# Allegro board proj1.brd
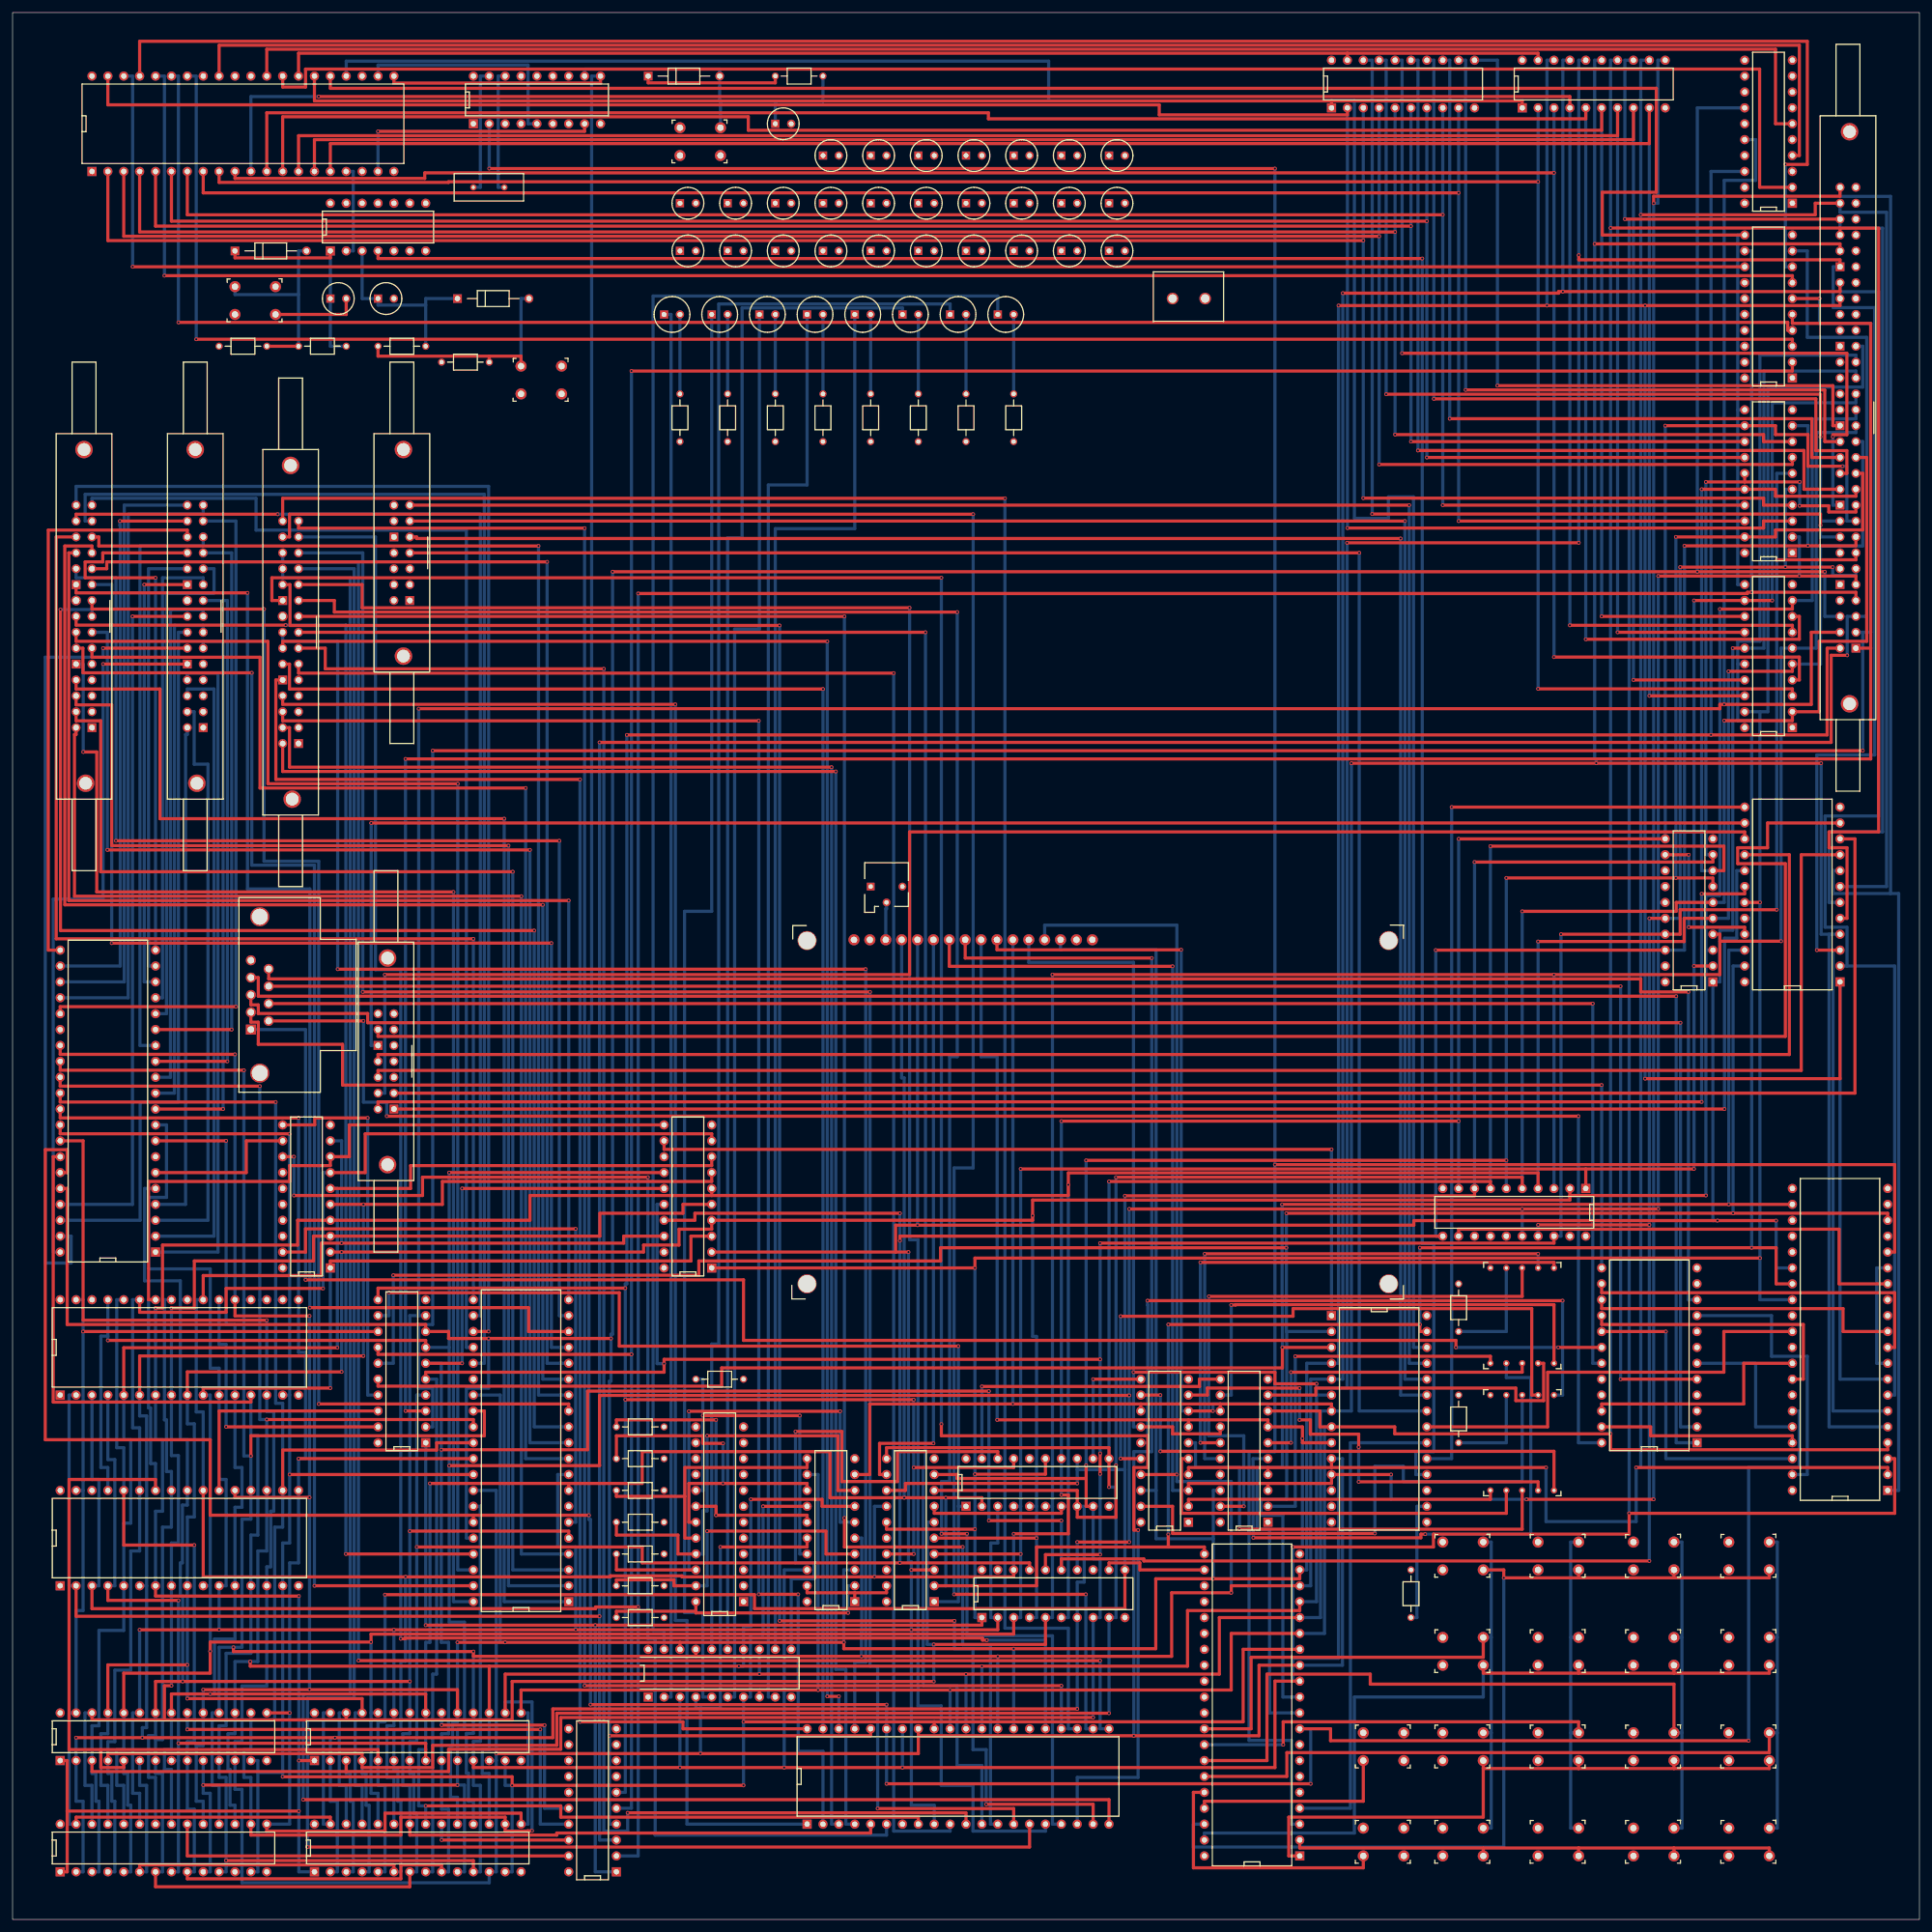
[diagram p0: board, top side]
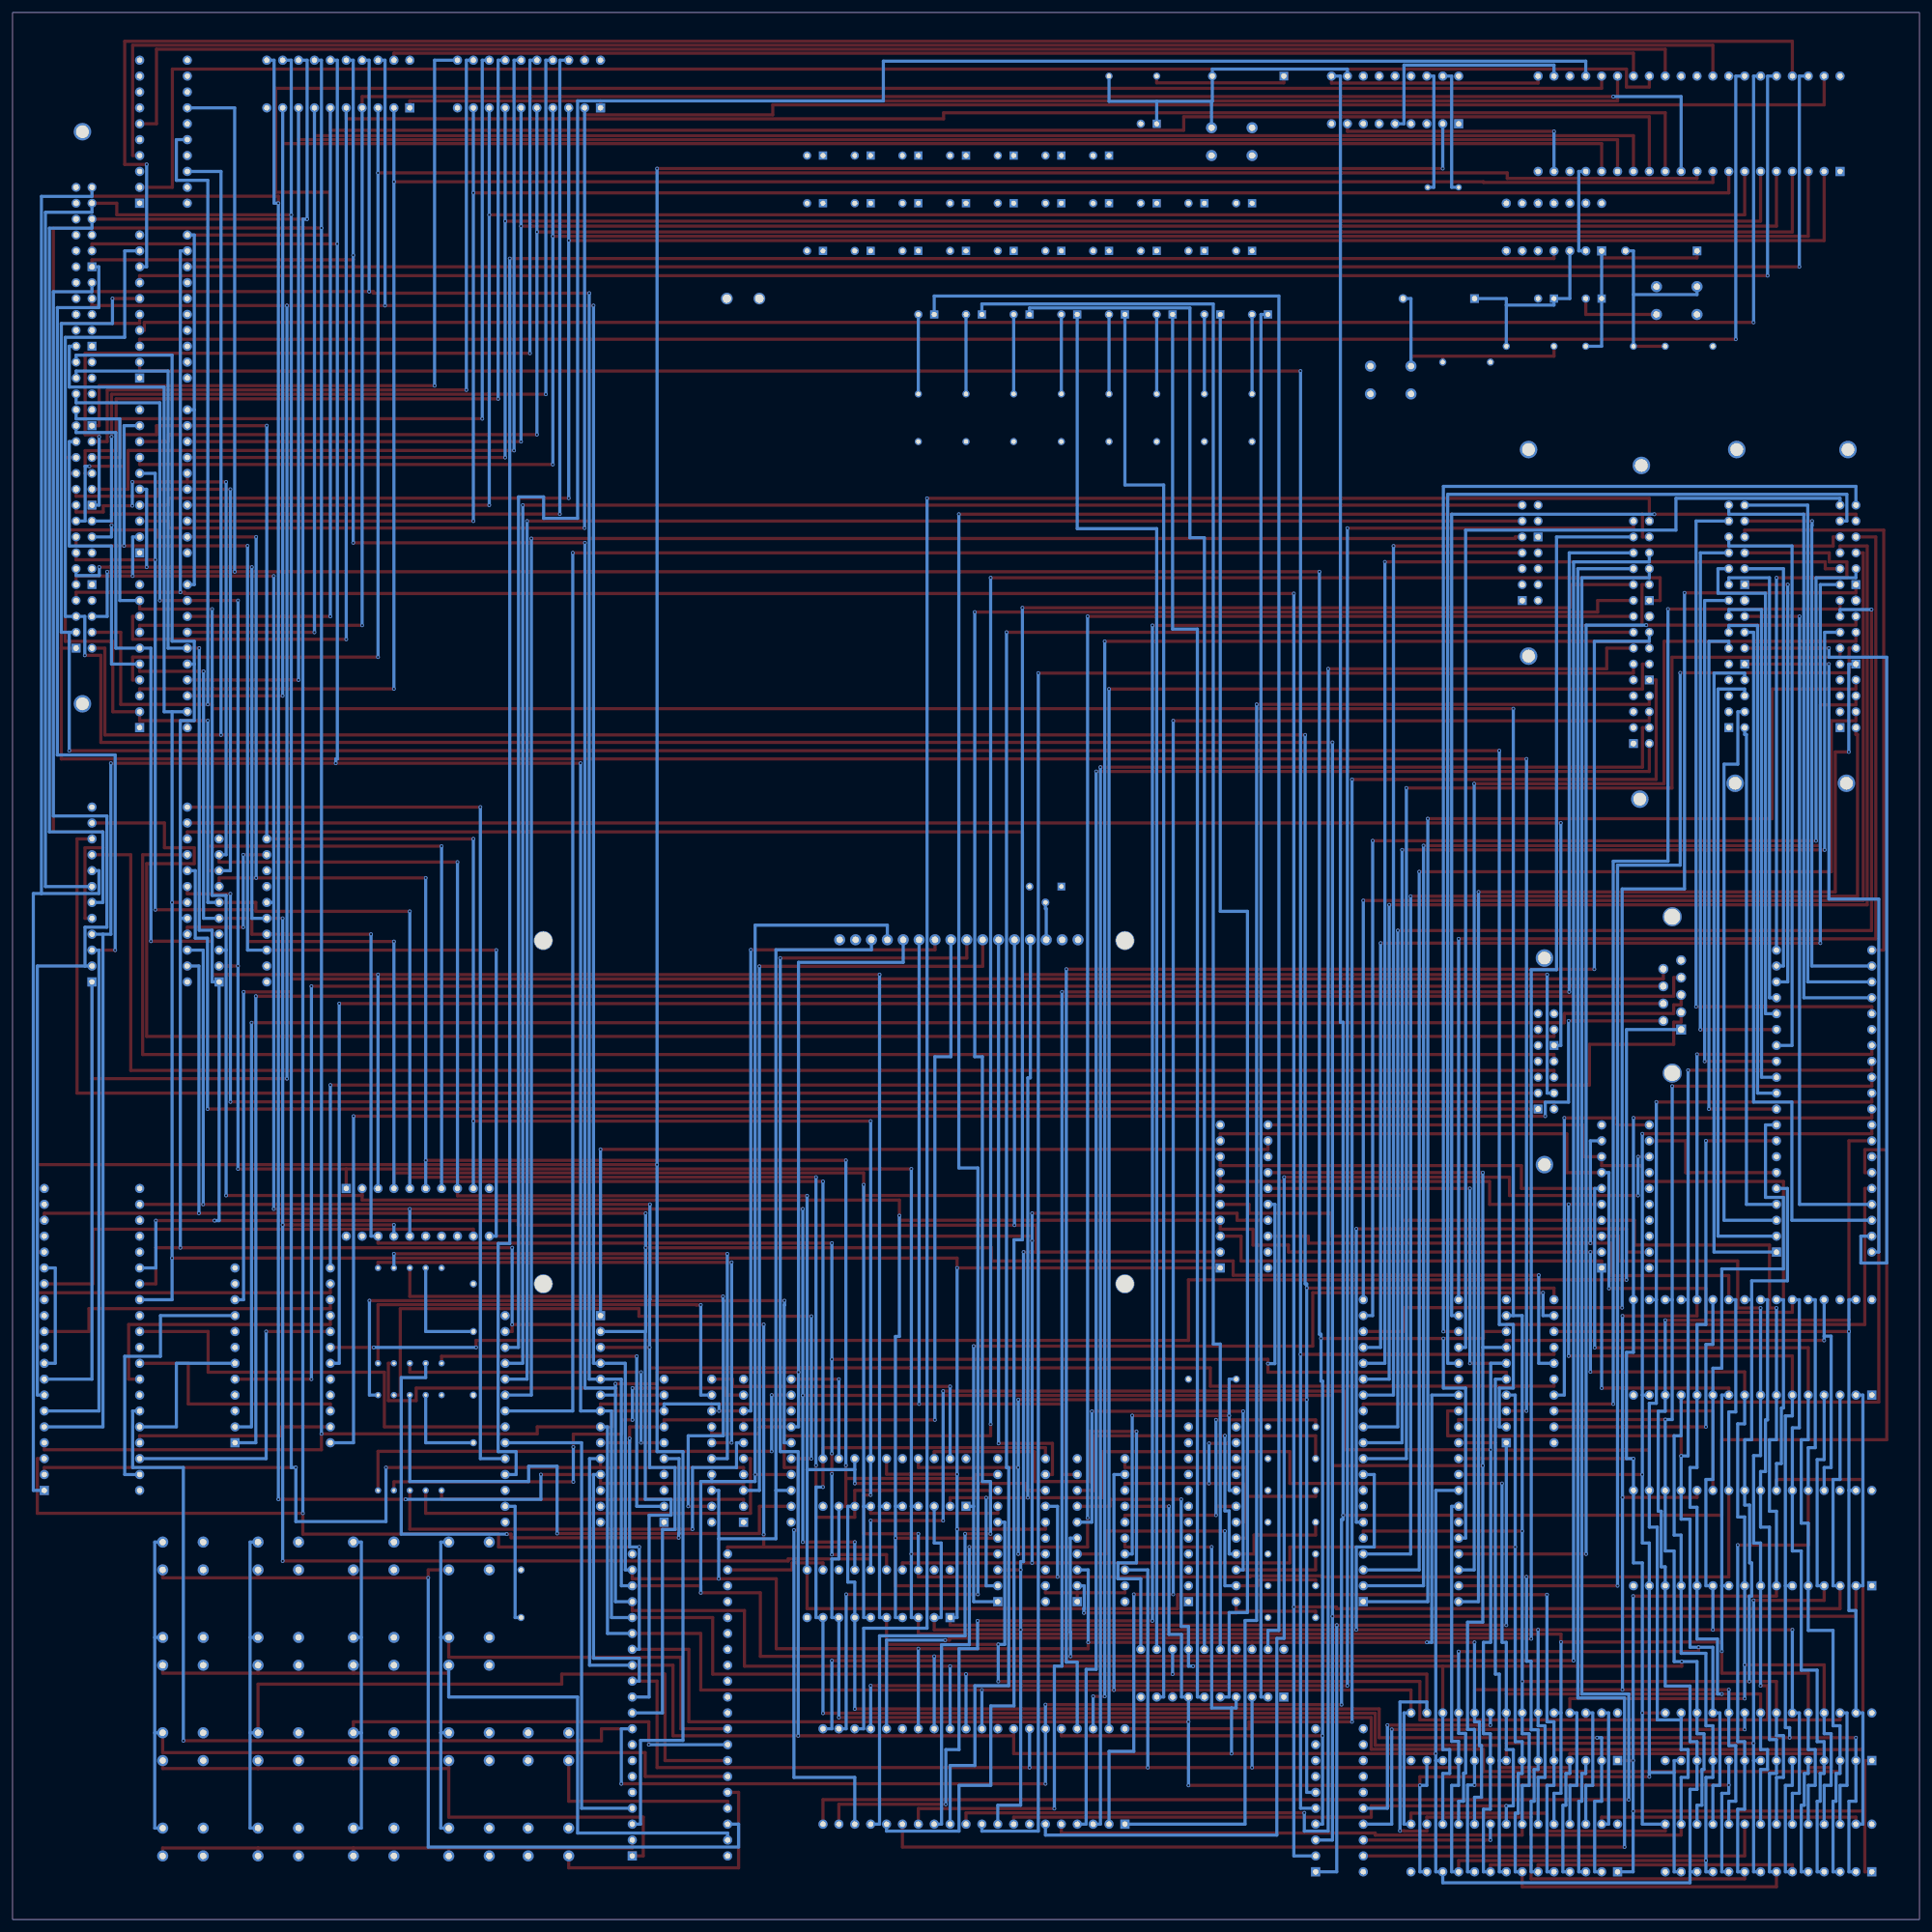
[diagram p1: board, bottom side, seen from below]

Outline 304.8 x 304.8 mm; copper layers: TOP, GND, POWER, BOTTOM. Coordinates in mm from the lower left corner of the outline.
Outline path: rectangle 0,0 304.8,304.8

## Placement (name value [footprint] x y rotation side)
C1  10u  [CPCYL1D200LS100031]  121.92 287.02 0 top
C8  0.1u  [CPCYL1D200LS100031]  175.26 266.7 0 top
C9  0.1u  [CPCYL1D200LS100031]  167.64 266.7 0 top
C10  0.1u  [CPCYL1D200LS100031]  160.02 266.7 0 top
C11  0.1u  [CPCYL1D200LS100031]  152.4 266.7 0 top
C12  0.1u  [CPCYL1D200LS100031]  144.78 266.7 0 top
C13  0.1u  [CPCYL1D200LS100031]  137.16 266.7 0 top
C14  100u  [CPCYL1D200LS100031]  129.54 266.7 0 top
C15  0.1u  [CPCYL1D200LS100031]  121.92 266.7 0 top
C16  0.1u  [CPCYL1D200LS100031]  114.3 266.7 0 top
C17  0.1u  [CPCYL1D200LS100031]  114.3 274.32 0 top
C18  0.1u  [CPCYL1D200LS100031]  121.92 274.32 0 top
C19  0.1u  [CPCYL1D200LS100031]  129.54 274.32 0 top
C20  0.1u  [CPCYL1D200LS100031]  137.16 274.32 0 top
C21  0.1u  [CPCYL1D200LS100031]  144.78 274.32 0 top
C22  0.1u  [CPCYL1D200LS100031]  152.4 274.32 0 top
C23  0.1u  [CPCYL1D200LS100031]  160.02 274.32 0 top
C24  0.1u  [CPCYL1D200LS100031]  167.64 274.32 0 top
C25  0.1u  [CPCYL1D200LS100031]  175.26 274.32 0 top
C26  0.1u  [CPCYL1D200LS100031]  175.26 281.94 0 top
C27  0.1u  [CPCYL1D200LS100031]  167.64 281.94 0 top
C28  CAP  [CPCYL1D200LS100031]  50.8 259.08 0 top
C29  CAP  [CPCYL1D200LS100031]  58.42 259.08 0 top
C30  0.1u  [CPCYL1D200LS100031]  160.02 281.94 0 top
C31  0.1u  [CPCYL1D200LS100031]  152.4 281.94 0 top
C32  0.1u  [CPCYL1D200LS100031]  144.78 281.94 0 top
C33  0.1u  [CPCYL1D200LS100031]  137.16 281.94 0 top
C34  0.1u  [CPCYL1D200LS100031]  129.54 281.94 0 top
C35  0.1u  [CPCYL1D200LS100031]  106.68 274.32 0 top
C36  0.1u  [CPCYL1D200LS100031]  106.68 266.7 0 top
D1  DIODE  [DAX1DO35]  101.6 294.64 0 top
D2  DIODE  [DAX1DO35]  35.56 266.7 0 top
D3  DIODE  [DAX1DO35]  71.12 259.08 0 top
D4  LED  [CYLD225LS100031]  157.48 256.54 0 top
D5  LED  [CYLD225LS100031]  149.86 256.54 0 top
D6  LED  [CYLD225LS100031]  142.24 256.54 0 top
D7  LED  [CYLD225LS100031]  134.62 256.54 0 top
D8  LED  [CYLD225LS100031]  127 256.54 0 top
D9  LED  [CYLD225LS100031]  119.38 256.54 0 top
D10  LED  [CYLD225LS100031]  111.76 256.54 0 top
D11  LED  [CYLD225LS100031]  104.14 256.54 0 top
J1  HEADER 15X2  [TYCO100VH30]  12.7 190.5 90 top
J4  HEADER 7X2  [TYCO100VH14J7]  60.96 129.54 90 top
J5  CONN DSUB 9-P  [DSUBRP318TM9]  38.1 142.24 90 top
J6  HEADER 7X2  [TYCO100VH14J7]  63.5 210.82 90 top
J7  CONN TRBLK 2  [PWR_TRM_BLK]  185.42 259.08 0 top
J8  HEADER 15X2  [TYCO100VH30]  30.48 190.5 90 top
J9  HEADER 15X2  [TYCO100VH30]  45.72 187.96 90 top
J10  HEADER 30x2/SM  [TYCO100VH60]  294.64 203.2 90 top
R1  10k  [AX300X100028]  121.92 294.64 0 top
R2  POT  [VRES1]  137.16 165.1 0 top
R3  10k  [AX300X100028]  231.14 93.98 90 top
R4  10k  [AX300X100028]  231.14 76.2 90 top
R5  RESISTOR  [AX300X100028]  33.02 251.46 0 top
R6  RESISTOR  [AX300X100028]  45.72 251.46 0 top
R7  RESISTOR  [AX300X100028]  68.58 248.92 0 top
R8  RESISTOR  [AX300X100028]  58.42 251.46 0 top
R9  RESISTOR  [AX300X100028]  106.68 236.22 90 top
R10  RESISTOR  [AX300X100028]  114.3 236.22 90 top
R11  RESISTOR  [AX300X100028]  121.92 236.22 90 top
R12  RESISTOR  [AX300X100028]  129.54 236.22 90 top
R13  RESISTOR  [AX300X100028]  137.16 236.22 90 top
R14  RESISTOR  [AX300X100028]  144.78 236.22 90 top
R15  RESISTOR  [AX300X100028]  152.4 236.22 90 top
R16  RESISTOR  [AX300X100028]  160.02 236.22 90 top
R17  RESISTOR  [AX300X100028]  223.52 48.26 90 top
R18  10k  [AX300X100028]  96.52 48.26 0 top
R19  10k  [AX300X100028]  96.52 53.34 0 top
R20  10k  [AX300X100028]  96.52 58.42 0 top
R21  10k  [AX300X100028]  96.52 63.5 0 top
R22  10k  [AX300X100028]  96.52 68.58 0 top
R23  10k  [AX300X100028]  96.52 73.66 0 top
R24  10k  [AX300X100028]  96.52 78.74 0 top
R25  10k  [AX300X100028]  109.22 86.36 0 top
SW1  SW TACT-SPST-2/SM  [PTS645]  106.68 281.94 0 top
SW2  SW TACT-SPST-2  [PTS645]  228.6 55.88 0 top
SW3  SW TACT-SPST-2  [PTS645]  243.84 55.88 0 top
SW4  SW TACT-SPST-2  [PTS645]  259.08 55.88 0 top
SW5  SW TACT-SPST-2  [PTS645]  274.32 55.88 0 top
SW6  SW TACT-SPST-2  [PTS645]  228.6 40.64 0 top
SW7  SW TACT-SPST-2  [PTS645]  243.84 40.64 0 top
SW8  SW TACT-SPST-2  [PTS645]  259.08 40.64 0 top
SW9  SW TACT-SPST-2  [PTS645]  274.32 40.64 0 top
SW10  SW TACT-SPST-2  [PTS645]  228.6 25.4 0 top
SW11  SW TACT-SPST-2  [PTS645]  243.84 25.4 0 top
SW12  SW TACT-SPST-2  [PTS645]  259.08 25.4 0 top
SW13  SW TACT-SPST-2  [PTS645]  274.32 25.4 0 top
SW14  SW TACT-SPST-2  [PTS645]  228.6 10.16 0 top
SW15  SW TACT-SPST-2  [PTS645]  243.84 10.16 0 top
SW16  SW TACT-SPST-2  [PTS645]  259.08 10.16 0 top
SW17  SW TACT-SPST-2  [PTS645]  274.32 10.16 0 top
SW18  SW TACT-SPST-2  [PTS645]  215.9 25.4 0 top
SW19  SW TACT-SPST-2  [PTS645]  215.9 10.16 0 top
SW21  SW TACT-SPST-2/SM  [PTS645]  35.56 256.54 0 top
SW22  SW TACT-SPST-2/SM  [PTS645]  81.28 243.84 0 top
SW24  SW DIP-12  [DIP10024W300L1275]  116.84 50.8 90 top
U1  8086MIN  [DIP10040W600L2025]  12.7 279.4 0 top
U2  8284A  [DIP10018W300L900]  73.66 287.02 0 top
U3  74LS244  [DIP10020W300L1000]  284.48 274.32 90 top
U4  74LS373  [DIP10020W300L1000]  284.48 246.38 90 top
U5  74LS373  [DIP10020W300L1000]  284.48 218.44 90 top
U6  74LS373  [DIP10020W300L1000]  284.48 190.5 90 top
U7  74LS245  [DIP10020W300L1000]  241.3 289.56 0 top
U8  74LS245  [DIP10020W300L1000]  210.82 289.56 0 top
U9  16L8  [DIP10020W300L1000]  66.04 76.2 90 top
U10  28F010  [DIP10032W600L1600]  7.62 53.34 0 top
U11  28F010  [DIP10032W600L1600]  7.62 83.82 0 top
U12  CY7C199  [DIP10028W300L1400]  7.62 7.62 0 top
U13  CY7C199  [DIP10028W300L1400]  48.26 7.62 0 top
U14  16L8  [DIP10020W300L1000]  96.52 7.62 90 top
U15  CY7C199  [DIP10028W300L1400]  7.62 25.4 0 top
U16  CY7C199  [DIP10028W300L1400]  48.26 25.4 0 top
U17  82C55  [DIP10040W600L2025]  88.9 50.8 90 top
U18  16L8  [DIP10020W300L1000]  50.8 104.14 90 top
U19  82C55  [DIP10040W600L2025]  22.86 106.68 90 top
U20  82C55  [DIP10040W600L2025]  127 15.24 0 top
U21  16L8  [DIP10020W300L1000]  154.94 48.26 0 top
U22  8279  [DIP10040W600L2025]  205.74 10.16 90 top
U23  8254  [DIP10024W600L1200]  292.1 149.86 90 top
U24  16L8  [DIP10020W300L1000]  271.78 149.86 90 top
U25  PC16550D  [DIP10040W600L2025]  299.72 68.58 90 top
U26  MAX235  [DIP10024W600L1200]  269.24 76.2 90 top
U27  16L8  [DIP10020W300L1000]  251.46 116.84 180 top
U28  8259A  [DIP10028W600L1400]  210.82 96.52 270 top
U29  16L8  [DIP10020W300L1000]  111.76 104.14 90 top
U30  LCD  [LCD_AMC2004A_REV1]  124.46 99.06 0 top
U31  7 Segment LED  [LED_HDSP_H101]  236.22 88.9 0 top
U32  74ALS374  [DIP10020W300L1000]  200.66 63.5 90 top
U33  7 Segment LED  [LED_HDSP_H101]  236.22 68.58 0 top
U34  74ALS374  [DIP10020W300L1000]  187.96 63.5 90 top
U35  74LS14  [DIP10014W300L700]  50.8 266.7 0 top
U37  74LS244  [DIP10020W300L1000]  134.62 50.8 90 top
U38  16L8  [DIP10020W300L1000]  152.4 66.04 0 top
U39  74LS374  [DIP10020W300L1000]  101.6 35.56 0 top
U40  16L8  [DIP10020W300L1000]  147.32 50.8 90 top
Y1  CRYSTAL  [XTAL_FOX]  73.66 276.86 0 top

## Library data of the parts
C1 = CAPACITOR
C8-C36 = CAP
D1-D3 = DIODE
D4-D11 = LED
J1 J8 J9 = HEADER 15X2
J4 J6 = HEADER 7X2
J5 = CONN DSUB 9-P
J7 = CONN TRBLK 2
J10 = HEADER 30x2/SM
R1 R3-R25 = RESISTOR
R2 = POT
SW1 SW21 SW22 = SW TACT-SPST-2/SM
SW2-SW19 = SW TACT-SPST-2
SW24 = SW DIP-12
U1 = 8086MIN
U2 = 8284A
U3 U37 = 74LS244
U4-U6 = 74LS373
U7 U8 = 74LS245
U9 = 16L8_8
U10 U11 = 28F010
U12 U13 U15 U16 = CY7C199
U14 U18 = 16L8
U17 U19 U20 = 82C55
U21 = 16L8_0
U22 = 8279
U23 = 8254
U24 = 16L8_1
U25 = PC16550D
U26 = MAX235
U27 = 16L8_2
U28 = 8259A
U29 = 16L8_3
U30 = LCD
U31 U33 = 7 Segment LED
U32 U34 = 74ALS374
U35 = 74LS14
U38 U40 = 16L8_10
U39 = 74LS374
Y1 = CRYSTAL

## Footprints (pads in the part's own frame, mm; a bottom-side part is the same pattern mirrored in y, then rotated)
AX300X100028
  round 1.143 hole 0.711: 1(0,0) 2(7.62,0)
CPCYL1D200LS100031
  rect 1.321x1.321 hole 0.787: 1(0,0)
  round 1.321 hole 0.787: 2(2.54,0)
CYLD225LS100031
  rect 1.321x1.321 hole 0.787: 1(0,0)
  round 1.321 hole 0.787: 2(2.54,0)
DAX1DO35
  rect 1.397x1.397 hole 0.864: 1(0,0)
  round 1.397 hole 0.864: 2(11.43,0)
DIP10014W300L700
  rect 1.473x1.473 hole 0.864: 1(0,0)
  round 1.473 hole 0.864: 2(2.54,0) 3(5.08,0) 4(7.62,0) 5(10.16,0) 6(12.7,0) 7(15.24,0) 8(15.24,7.62) 9(12.7,7.62) 10(10.16,7.62) 11(7.62,7.62) 12(5.08,7.62) 13(2.54,7.62) 14(0,7.62)
DIP10018W300L900
  rect 1.473x1.473 hole 0.864: 1(0,0)
  round 1.473 hole 0.864: 2(2.54,0) 3(5.08,0) 4(7.62,0) 5(10.16,0) 6(12.7,0) 7(15.24,0) 8(17.78,0) 9(20.32,0) 10(20.32,7.62) 11(17.78,7.62) 12(15.24,7.62) 13(12.7,7.62) 14(10.16,7.62) 15(7.62,7.62) 16(5.08,7.62) 17(2.54,7.62) 18(0,7.62)
DIP10020W300L1000
  rect 1.473x1.473 hole 0.864: 1(0,0)
  round 1.473 hole 0.864: 2(2.54,0) 3(5.08,0) 4(7.62,0) 5(10.16,0) 6(12.7,0) 7(15.24,0) 8(17.78,0) 9(20.32,0) 10(22.86,0) 11(22.86,7.62) 12(20.32,7.62) 13(17.78,7.62) 14(15.24,7.62) 15(12.7,7.62) 16(10.16,7.62) 17(7.62,7.62) 18(5.08,7.62) 19(2.54,7.62) 20(0,7.62)
DIP10024W300L1275
  rect 1.473x1.473 hole 0.864: 1(0,0)
  round 1.473 hole 0.864: 2(2.54,0) 3(5.08,0) 4(7.62,0) 5(10.16,0) 6(12.7,0) 7(15.24,0) 8(17.78,0) 9(20.32,0) 10(22.86,0) 11(25.4,0) 12(27.94,0) 13(27.94,7.62) 14(25.4,7.62) 15(22.86,7.62) 16(20.32,7.62) 17(17.78,7.62) 18(15.24,7.62) 19(12.7,7.62) 20(10.16,7.62) 21(7.62,7.62) 22(5.08,7.62) 23(2.54,7.62) 24(0,7.62)
DIP10024W600L1200
  rect 1.473x1.473 hole 0.864: 1(0,0)
  round 1.473 hole 0.864: 2(2.54,0) 3(5.08,0) 4(7.62,0) 5(10.16,0) 6(12.7,0) 7(15.24,0) 8(17.78,0) 9(20.32,0) 10(22.86,0) 11(25.4,0) 12(27.94,0) 13(27.94,15.24) 14(25.4,15.24) 15(22.86,15.24) 16(20.32,15.24) 17(17.78,15.24) 18(15.24,15.24) 19(12.7,15.24) 20(10.16,15.24) 21(7.62,15.24) 22(5.08,15.24) 23(2.54,15.24) 24(0,15.24)
DIP10028W300L1400
  rect 1.473x1.473 hole 0.864: 1(0,0)
  round 1.473 hole 0.864: 2(2.54,0) 3(5.08,0) 4(7.62,0) 5(10.16,0) 6(12.7,0) 7(15.24,0) 8(17.78,0) 9(20.32,0) 10(22.86,0) 11(25.4,0) 12(27.94,0) 13(30.48,0) 14(33.02,0) 15(33.02,7.62) 16(30.48,7.62) 17(27.94,7.62) 18(25.4,7.62) 19(22.86,7.62) 20(20.32,7.62) 21(17.78,7.62) 22(15.24,7.62) 23(12.7,7.62) 24(10.16,7.62) 25(7.62,7.62) 26(5.08,7.62) 27(2.54,7.62) 28(0,7.62)
DIP10028W600L1400
  rect 1.473x1.473 hole 0.864: 1(0,0)
  round 1.473 hole 0.864: 2(2.54,0) 3(5.08,0) 4(7.62,0) 5(10.16,0) 6(12.7,0) 7(15.24,0) 8(17.78,0) 9(20.32,0) 10(22.86,0) 11(25.4,0) 12(27.94,0) 13(30.48,0) 14(33.02,0) 15(33.02,15.24) 16(30.48,15.24) 17(27.94,15.24) 18(25.4,15.24) 19(22.86,15.24) 20(20.32,15.24) 21(17.78,15.24) 22(15.24,15.24) 23(12.7,15.24) 24(10.16,15.24) 25(7.62,15.24) 26(5.08,15.24) 27(2.54,15.24) 28(0,15.24)
DIP10032W600L1600
  rect 1.473x1.473 hole 0.864: 1(0,0)
  round 1.473 hole 0.864: 2(2.54,0) 3(5.08,0) 4(7.62,0) 5(10.16,0) 6(12.7,0) 7(15.24,0) 8(17.78,0) 9(20.32,0) 10(22.86,0) 11(25.4,0) 12(27.94,0) 13(30.48,0) 14(33.02,0) 15(35.56,0) 16(38.1,0) 17(38.1,15.24) 18(35.56,15.24) 19(33.02,15.24) 20(30.48,15.24) 21(27.94,15.24) 22(25.4,15.24) 23(22.86,15.24) 24(20.32,15.24) 25(17.78,15.24) 26(15.24,15.24) 27(12.7,15.24) 28(10.16,15.24) 29(7.62,15.24) 30(5.08,15.24) 31(2.54,15.24) 32(0,15.24)
DIP10040W600L2025
  rect 1.473x1.473 hole 0.864: 1(0,0)
  round 1.473 hole 0.864: 2(2.54,0) 3(5.08,0) 4(7.62,0) 5(10.16,0) 6(12.7,0) 7(15.24,0) 8(17.78,0) 9(20.32,0) 10(22.86,0) 11(25.4,0) 12(27.94,0) 13(30.48,0) 14(33.02,0) 15(35.56,0) 16(38.1,0) 17(40.64,0) 18(43.18,0) 19(45.72,0) 20(48.26,0) 21(48.26,15.24) 22(45.72,15.24) 23(43.18,15.24) 24(40.64,15.24) 25(38.1,15.24) 26(35.56,15.24) 27(33.02,15.24) 28(30.48,15.24) 29(27.94,15.24) 30(25.4,15.24) 31(22.86,15.24) 32(20.32,15.24) 33(17.78,15.24) 34(15.24,15.24) 35(12.7,15.24) 36(10.16,15.24) 37(7.62,15.24) 38(5.08,15.24) 39(2.54,15.24) 40(0,15.24)
DSUBRP318TM9
  rect 1.6x1.6 hole 1.067: 1(0,0)
  round 1.6 hole 1.067: 2(2.769,0) 3(5.537,0) 4(8.306,0) 5(11.074,0) 6(1.384,-2.845) 7(4.153,-2.845) 8(6.921,-2.845) 9(9.69,-2.845)
  round 3.048 hole 2.54: HOLE49(-6.96,-1.422) HOLE50(18.034,-1.422)
LCD_AMC2004A_REV1
  round 1.778 hole 1.029: 1(10.033,57.531) 2(12.573,57.531) 3(15.113,57.531) 4(17.653,57.531) 5(20.193,57.531) 6(22.733,57.531) 7(25.273,57.531) 8(27.813,57.531) 9(30.353,57.531) 10(32.893,57.531) 11(35.433,57.531) 12(37.973,57.531) 13(40.513,57.531) 14(43.053,57.531) 15(45.593,57.531) 16(48.133,57.531)
  round 3.048 hole 2.794: HOLE_LL(2.54,2.54) HOLE_LM(2.54,57.404) HOLE_LN(95.504,2.54) HOLE_LO(95.504,57.404)
LED_HDSP_H101
  round 1.016 hole 0.508: 1(0,0) 2(2.54,0) 3(5.08,0) 4(7.62,0) 5(10.16,0) 6(10.16,15.24) 7(7.62,15.24) 8(5.08,15.24) 9(2.54,15.24) 10(0,15.24)
PTS645
  round 1.778 hole 1.029: 1(0,0) 2(6.477,0) 3(0,4.445) 4(6.477,4.445)
PWR_TRM_BLK
  round 1.867 hole 1.359: 1(0,0) 2(5.207,0)
TYCO100VH14J7
  rect 1.422x1.422 hole 0.914: 1(0,0) 10(10.16,2.54)
  round 1.422 hole 0.914: 2(0,2.54) 3(2.54,0) 4(2.54,2.54) 5(5.08,0) 6(5.08,2.54) 7(7.62,0) 8(7.62,2.54) 9(10.16,0) 11(12.7,0) 12(12.7,2.54) 13(15.24,0) 14(15.24,2.54)
  round 2.794 hole 2.032: HOLE1(-8.89,1.016) HOLE2(24.13,1.016)
TYCO100VH30
  rect 1.422x1.422 hole 0.914: 1(0,0) 10(10.16,2.54) 20(22.86,2.54)
  round 1.422 hole 0.914: 2(0,2.54) 3(2.54,0) 4(2.54,2.54) 5(5.08,0) 6(5.08,2.54) 7(7.62,0) 8(7.62,2.54) 9(10.16,0) 11(12.7,0) 12(12.7,2.54) 13(15.24,0) 14(15.24,2.54) 15(17.78,0) 16(17.78,2.54) 17(20.32,0) 19(22.86,0) 21(25.4,0) 22(25.4,2.54) 23(27.94,0) 24(27.94,2.54) 25(30.48,0) 26(30.48,2.54) 27(33.02,0) 28(33.02,2.54) 29(35.56,0) 30(35.56,2.54)
  round 1.575 hole 1.067: 18(20.32,2.54)
  round 2.794 hole 2.032: HOLE1(-8.89,1.016) HOLE2(44.45,1.27)
TYCO100VH60
  rect 1.422x1.422 hole 0.914: 1(0,0) 10(10.16,2.54) 20(22.86,2.54) 30(35.56,2.54) 40(48.26,2.54) 50(60.96,2.54)
  round 1.422 hole 0.914: 2(0,2.54) 3(2.54,0) 4(2.54,2.54) 5(5.08,0) 6(5.08,2.54) 7(7.62,0) 8(7.62,2.54) 9(10.16,0) 11(12.7,0) 12(12.7,2.54) 13(15.24,0) 14(15.24,2.54) 15(17.78,0) 16(17.78,2.54) 17(20.32,0) 18(20.32,2.54) 19(22.86,0) 21(25.4,0) 22(25.4,2.54) 23(27.94,0) 24(27.94,2.54) 25(30.48,0) 26(30.48,2.54) 27(33.02,0) 28(33.02,2.54) 29(35.56,0) 31(38.1,0) 32(38.1,2.54) 33(40.64,0) 34(40.64,2.54) 35(43.18,0) 36(43.18,2.54) 37(45.72,0) 38(45.72,2.54) 39(48.26,0) 41(50.8,0) 42(50.8,2.54) 43(53.34,0) 44(53.34,2.54) 45(55.88,0) 46(55.88,2.54) 47(58.42,0) 48(58.42,2.54) 49(60.96,0) 51(63.5,0) 52(63.5,2.54) 53(66.04,0) 54(66.04,2.54) 55(68.58,0) 56(68.58,2.54) 57(71.12,0) 58(71.12,2.54) 59(73.66,0) 60(73.66,2.54)
  round 2.794 hole 2.032: HOLE1(-8.89,1.016) HOLE2(82.55,1.016)
VRES1
  rect 1.245x1.245 hole 0.711: 1(0,0)
  round 1.245 hole 0.711: 2(2.54,-2.54) 3(5.08,0)
XTAL_FOX
  round 1.016 hole 0.508: 1(0,0) 2(4.953,0)

## Nets
+5V: D1.1(K) R1.1
GND: C1.2 C8.1 C8.2 C9.1 C9.2 C10.1 C10.2 C11.1 C11.2 C12.1 C12.2 C13.1 C13.2 C14.1 C14.2 C15.1 C15.2 C16.1 C16.2 C17.1 C17.2 C18.1 C18.2 C19.1 C19.2 C20.1 C20.2 C21.1 C21.2 C22.1 C22.2 C23.1 C23.2 C24.1 C24.2 C25.1 C25.2 C26.1 C26.2 C27.1 C27.2 C29.2 C30.1 C30.2 C31.1 C31.2 C32.1 C32.2 C33.1 C33.2 C34.1 C34.2 C35.1 C35.2 C36.1 C36.2 J5.5 J7.1 J7.2 R2.1(A) R2.3(B) R3.2 R4.2 R5.1 R7.1 R9.1 R10.1 R11.1 R12.1 R13.1 R14.1 R15.1 R16.1 R17.2 R18.2 R19.2 R20.2 R21.2 R22.2 R23.2 R24.2 R25.2 SW1.2 SW18.3 SW19.3 SW21.1 SW22.2 SW24.1(A1) SW24.2(A2) SW24.3(A3) SW24.4(A4) SW24.5(A5) SW24.6(A6) SW24.7(A7) SW24.8(A8) U1.1 U1.20 U1.33(MN) U1.40 U2.1(CSYNC) U2.9 U2.13(F/C\) U2.18 U3.1(1\O\E\) U3.10 U3.19(2\O\E\) U3.20 U4.1(O\E\) U4.10 U4.20 U5.1(O\E\) U5.10 U5.20 U6.1(O\E\) U6.10 U6.20 U7.10 U7.20 U8.10 U8.20 U9.10 U9.20 U10.1(VPP) U10.16 U10.32 U11.1(VPP) U11.16 U11.32 U12.14 U12.28(VCC) U13.14 U13.28(VCC) U14.10 U14.20 U15.14 U15.28(VCC) U16.14 U16.28(VCC) U17.7 U17.26 U18.10 U18.20 U19.7 U19.26 U20.7 U20.26 U21.10 U21.20 U22.20 U22.40 U23.12 U23.24 U24.10 U24.20 U25.12(CS0) U25.13(CS1) U25.19(WR) U25.20 U25.21(R\D\) U25.25(A\D\S\) U25.40 U26.11 U26.12 U27.10 U27.20 U28.14 U28.28 U29.10 U29.20 U30.1(GND) U32.1(O\E\) U32.10 U32.20 U34.1(O\E\) U34.10 U34.20 U35.7 U35.14 U37.10 U37.20 U38.10 U38.20 U39.1(O\E\) U39.10 U39.20 U40.10 U40.20
VDD: U30.2(VDD)
A0: J10.39 U6.19(Q7) U9.1(I1) U14.1(I1) U21.1(I1) U23.19(A0) U25.28(A0) U29.1(I1) U38.15(O\5\) U40.15(O\5\)
A1: J10.37 U6.16(Q6) U10.12(A0) U11.12(A0) U12.21(A0) U13.21(A0) U15.21(A0) U16.21(A0) U17.8(A1) U19.8(A1) U20.8(A1) U22.21(A0) U23.20(A1) U25.27(A1) U28.27(A0) U30.4(RS) U38.2(I2) U40.2(I2)
A2: J10.35 U6.15(Q5) U10.11(A1) U11.11(A1) U12.23(A1) U13.23(A1) U15.23(A1) U16.23(A1) U17.9(A0) U19.9(A0) U20.9(A0) U21.2(I2) U24.1(I1) U25.26(A2) U29.2(I2) U30.5(R/W) U38.3(I3) U40.3(I3)
A3: J10.33 U6.12(Q4) U10.10(A2) U11.10(A2) U12.24(A2) U13.24(A2) U15.24(A2) U16.24(A2) U18.1(I1) U21.3(I3) U24.2(I2) U27.1(I1) U29.3(I3) U38.4(I4) U40.4(I4)
A4: J10.31 U6.9(Q3) U10.9(A3) U11.9(A3) U12.25(A3) U13.25(A3) U15.25(A3) U16.25(A3) U18.2(I2) U21.4(I4) U24.3(I3) U27.2(I2) U29.4(I4) U38.5(I5) U40.5(I5)
A5: J10.29 U6.6(Q2) U10.8(A4) U11.8(A4) U12.26(A4) U13.26(A4) U15.26(A4) U16.26(A4) U18.3(I3) U21.5(I5) U24.4(I4) U27.3(I3) U29.5(I5) U38.6(I6) U40.6(I6)
A6: J10.27 U6.5(Q1) U10.7(A5) U11.7(A5) U12.1(A5) U13.1(A5) U15.1(A5) U16.1(A5) U18.4(I4) U21.6(I6) U24.5(I5) U27.4(I4) U29.6(I6) U38.7(I7) U40.7(I7)
A7: J10.25 U6.2(Q0) U10.6(A6) U11.6(A6) U12.2(A6) U13.2(A6) U15.2(A6) U16.2(A6) U18.5(I5) U21.7(I7) U24.6(I6) U27.5(I5) U29.7(I7) U38.8(I8) U40.8(I8)
A8: J10.23 U5.19(Q7) U10.5(A7) U11.5(A7) U12.3(A7) U13.3(A7) U15.3(A7) U16.3(A7) U18.6(I6) U21.8(I8) U24.7(I7) U27.6(I6) U29.8(I8) U38.9(I9) U40.9(I9)
A9: J10.21 U5.16(Q6) U10.27(A8) U11.27(A8) U12.4(A8) U13.4(A8) U15.4(A8) U16.4(A8) U18.7(I7) U21.9(I9) U24.8(I8) U27.7(I7) U29.9(I9) U38.11(I10) U40.11(I10)
A10: J10.19 U5.15(Q5) U10.26(A9) U11.26(A9) U12.5(A9) U13.5(A9) U15.5(A9) U16.5(A9) U18.8(I8) U21.11(I10) U24.9(I9) U27.8(I8) U29.11(I10) U38.13(O\7\) U40.13(O\7\)
A11: J10.17 U5.12(Q4) U10.23(A10) U11.23(A10) U12.6(A10) U13.6(A10) U15.6(A10) U16.6(A10) U18.9(I9) U21.18(O\2\) U24.11(I10) U27.9(I9) U29.18(O\2\) U38.14(O\6\) U40.14(O\6\)
A12: J10.15 U5.9(Q3) U9.4(I4) U10.25(A11) U11.25(A11) U12.7(A11) U13.7(A11) U15.7(A11) U16.7(A11) U21.17(O\3\) U24.18(O\2\) U27.11(I10) U29.17(O\3\)
A12-A15: U9.12(O\8\) U38.1(I1) U40.1(I1)
A13: J10.13 U5.6(Q2) U9.5(I5) U10.4(A12) U11.4(A12) U12.8(A12) U13.8(A12) U15.8(A12) U16.8(A12) U21.16(O\4\) U24.17(O\3\) U27.18(O\2\) U29.16(O\4\)
A14: J10.11 U5.5(Q1) U9.6(I6) U10.28(A13) U11.28(A13) U12.9(A13) U13.9(A13) U15.9(A13) U16.9(A13) U21.15(O\5\) U24.16(O\4\) U27.17(O\3\) U29.15(O\5\)
A15: J10.9 U5.2(Q0) U9.7(I7) U10.29(A14) U11.29(A14) U12.10(A14) U13.10(A14) U15.10(A14) U16.10(A14) U21.14(O\6\) U24.15(O\5\) U27.16(O\4\) U29.14(O\6\)
A16: J10.7 U4.12(Q4) U10.3(A15) U11.3(A15) U14.2(I2)
A17: J10.5 U4.9(Q3) U10.2(A16) U11.2(A16) U14.3(I3)
A18: J10.3 U4.6(Q2) U9.2(I2)
A19: J10.1 U4.5(Q1) U9.3(I3)
A[0,12-15]: U9.17(O\3\) U18.11(I10)
AD0: U1.16(AD0) U6.18(D7) U7.9(A7)
AD1: U1.15(AD1) U6.17(D6) U7.8(A6)
AD2: U1.14(AD2) U6.14(D5) U7.7(A5)
AD3: U1.13(AD3) U6.13(D4) U7.6(A4)
AD4: U1.12(AD4) U6.8(D3) U7.5(A3)
AD5: U1.11(AD5) U6.7(D2) U7.4(A2)
AD6: U1.10(AD6) U6.4(D1) U7.3(A1)
AD7: U1.9(AD7) U6.3(D0) U7.2(A0)
AD8: U1.8(AD8) U5.18(D7) U8.9(A7)
AD9: U1.7(AD9) U5.17(D6) U8.8(A6)
AD10: U1.6(AD10) U5.14(D5) U8.7(A5)
AD11: U1.5(AD11) U5.13(D4) U8.6(A4)
AD12: U1.4(AD12) U5.8(D3) U8.5(A3)
AD13: U1.3(AD13) U5.7(D2) U8.4(A2)
AD14: U1.2(AD14) U5.4(D1) U8.3(A1)
AD15: U1.39(AD15) U5.3(D0) U8.2(A0)
AD16: U1.38(A16/S3) U4.13(D4)
AD17: U1.37(A17/S4) U4.8(D3)
AD18: U1.36(A18/S5) U4.7(D2)
AD19: U1.35(A19/S6) U4.4(D1)
ALE: U1.25(ALE) U4.11(L\E\) U5.11(L\E\) U6.11(L\E\)
BHE: U4.2(Q0) U9.14(O\6\) U14.5(I5)
BHEX: U1.34(B\H\E\/S7) U4.3(D0)
BWE: U9.13(O\7\) U10.31(W\E\) U11.31(W\E\) U12.27(W\E\) U13.27(W\E\) U15.27(W\E\) U16.27(W\E\)
D0: J10.60 U7.11(B7) U10.13(DQ0) U11.13(DQ0) U12.11(D0) U13.11(D0) U15.11(D0) U16.11(D0) U17.34(D0) U19.34(D0) U20.34(D0) U22.12(DB0) U23.8(D0) U25.1(D0) U28.11(D0) U30.7(DB0) U32.3(D0) U34.3(D0) U37.18(Y1) U39.3(D0)
D1: J10.58 U7.12(B6) U10.14(DQ1) U11.14(DQ1) U12.12(D1) U13.12(D1) U15.12(D1) U16.12(D1) U17.33(D1) U19.33(D1) U20.33(D1) U22.13(DB1) U23.7(D1) U25.2(D1) U28.10(D1) U30.8(DB1) U32.4(D1) U34.4(D1) U37.16(Y2) U39.4(D1)
D2: J10.56 U7.13(B5) U10.15(DQ2) U11.15(DQ2) U12.13(D2) U13.13(D2) U15.13(D2) U16.13(D2) U17.32(D2) U19.32(D2) U20.32(D2) U22.14(DB2) U23.6(D2) U25.3(D2) U28.9(D2) U30.9(DB2) U32.7(D2) U34.7(D2) U37.14(Y3) U39.7(D2)
D3: J10.54 U7.14(B4) U10.17(DQ3) U11.17(DQ3) U12.15(D3) U13.15(D3) U15.15(D3) U16.15(D3) U17.31(D3) U19.31(D3) U20.31(D3) U22.15(DB3) U23.5(D3) U25.4(D3) U28.8(D3) U30.10(DB3) U32.8(D3) U34.8(D3) U37.12(Y4) U39.8(D3)
D4: J10.52 U7.15(B3) U10.18(DQ4) U11.18(DQ4) U12.16(D4) U13.16(D4) U15.16(D4) U16.16(D4) U17.30(D4) U19.30(D4) U20.30(D4) U22.16(DB4) U23.4(D4) U25.5(D4) U28.7(D4) U30.11(DB4) U32.13(D4) U34.13(D4) U37.9(Y5) U39.13(D4)
D5: J10.50 U7.16(B2) U10.19(DQ5) U11.19(DQ5) U12.17(D5) U13.17(D5) U15.17(D5) U16.17(D5) U17.29(D5) U19.29(D5) U20.29(D5) U22.17(DB5) U23.3(D5) U25.6(D5) U28.6(D5) U30.12(DB5) U32.14(D5) U34.14(D5) U37.7(Y6) U39.14(D5)
D6: J10.48 U7.17(B1) U10.20(DQ6) U11.20(DQ6) U12.18(D6) U13.18(D6) U15.18(D6) U16.18(D6) U17.28(D6) U19.28(D6) U20.28(D6) U22.18(DB6) U23.2(D6) U25.7(D6) U28.5(D6) U30.13(DB6) U32.17(D6) U34.17(D6) U37.5(Y7) U39.17(D6)
D7: J10.46 U7.18(B0) U10.21(DQ7) U11.21(DQ7) U12.19(D7) U13.19(D7) U15.19(D7) U16.19(D7) U17.27(D7) U19.27(D7) U20.27(D7) U22.19(DB7) U23.1(D7) U25.8(D7) U28.4(D7) U30.14(DB7) U32.18(D7) U34.18(D7) U37.3(Y8) U39.18(D7)
D8: J10.30 U8.11(B7)
D9: J10.28 U8.12(B6)
D10: J10.26 U8.13(B5)
D11: J10.24 U8.14(B4)
D12: J10.22 U8.15(B3)
D13: J10.20 U8.16(B2)
D14: J10.18 U8.17(B1)
D15: J10.16 U8.18(B0)
DEN: U1.26(D\E\N\) U7.1(DIR) U8.1(DIR)
DTR: U1.27(DT/R\) U7.19(G\) U8.19(G\)
INTA: U1.24(I\N\T\A\) U28.26(I\N\T\A\)
INTR: U28.17(INT)
IORC: U9.16(O\4\) U22.10(R\D\) U23.22(R\D\) U25.22(RD) U28.3(R\D\)
IOWC: U9.15(O\5\) U22.11(W\R\) U23.23(W\R\) U25.18(W\R\) U28.2(W\R\)
IR1: U23.13(OUT1) U28.19(IR1)
IR2: U22.4(IRQ) U28.20(IR2)
IR3: U25.30(INTR) U28.21(IR3)
MIO: J10.2 U3.18(Y1) U9.11(I10) U14.6(I6) U38.17(O\3\) U40.17(O\3\)
MIOX: U1.28(M/I\O\) U3.2(A1)
PCLK: U2.2(PCLK) U22.3(CLK) U25.16(XIN)
RD: J10.4 U3.16(Y2) U9.9(I9) U10.24(O\E\) U11.24(O\E\) U12.22(O\E\) U13.22(O\E\) U15.22(O\E\) U16.22(O\E\) U17.5(R\D\) U19.5(R\D\) U20.5(R\D\)
RDX: U1.32(R\D\) U3.4(A2)
RESET: U1.21(RST) U2.10(RESET) U17.35(RESET) U19.35(RESET) U20.35(RESET) U22.9(RESET) U25.35(MR)
WR: J10.6 U3.14(Y3) U9.8(I8) U14.4(I4) U17.36(W\R\) U19.36(W\R\) U20.36(W\R\)
WRX: U1.29(W\R\) U3.6(A3)
N00598: C1.1 D1.2(A) R1.2 SW1.4 U2.11(R\E\S\)
N00858: U2.16(X2) Y1.2
N00870: U2.17(X1) Y1.1
N02031: U1.22(READY) U2.5(READY)
N02057: U1.19(CLK) U2.8(CLK)
N17816: U9.18(O\2\) U10.22(C\E\)
N17828: U9.19(O\1\) U11.22(C\E\)
N20853: U12.20(C\E\) U14.19(O\1\)
N20865: U13.20(C\E\) U14.18(O\2\)
N20889: U14.17(O\3\) U15.20(C\E\)
N22167: U14.16(O\4\) U16.20(C\E\)
N43084: U17.6(C\S\) U18.19(O\1\)
N43098: U18.12(O\8\) U19.6(C\S\)
N43134: U18.13(O\7\) U20.6(C\S\)
N55935: SW2.2 SW3.2 SW4.2 SW5.2 U22.38(RL0)
N56126: SW6.2 SW7.2 SW8.2 SW9.2 U22.39(RL1)
N56183: SW10.2 SW11.2 SW12.2 SW13.2 U22.1(RL2)
N56240: SW14.2 SW15.2 SW16.2 SW17.2 U22.2(RL3)
N56297: SW5.4 SW9.4 SW13.4 SW17.4 U22.35(SL3)
N56375: SW4.4 SW8.4 SW12.4 SW16.4 U22.34(SL2)
N56504: SW3.4 SW7.4 SW11.4 SW15.4 U22.33(SL1)
N56571: SW2.4 SW6.4 SW10.4 SW14.4 U22.32(SL0)
N56977: SW18.1 U22.37(CN/ST)
N56984: SW19.1 U22.36(SHFT)
N57547: U21.12(O\8\) U22.22(C\S\)
N72808: J4.12 U23.11(G0)
N72812: J4.10 U23.14(G1)
N72816: J4.8 U23.16(G2)
N72827: J4.4 U23.15(CLK1)
N72839: J4.2 U23.18(CLK2)
N73545: J4.6 U23.9(CLK0)
N73567: U23.21(C\S\) U24.12(O\8\)
N94994: J5.7 U26.19(T5OUT)
N95164: J5.4 U26.1(T4OUT)
N95197: J5.6 U26.24(R3IN)
N95219: J5.8 U26.5(R2IN)
N95249: J5.9 U26.10(R1IN)
N95927: U25.14(C\S\2\) U27.12(O\8\)
N96250: U25.9(RCLK) U25.15(B\A\U\D\O\U\T\)
N96341: U25.32(R\T\S\) U26.22(T5IN)
N96351: U25.11(SOUT) U26.15(T3IN)
N96734: J5.3 U26.2(T3OUT)
N96865: U25.10(SIN) U26.14(R5OUT)
N117395: U25.38(D\C\D\) U26.17(R4OUT)
N117411: U25.37(D\S\R\) U26.23(R3OUT)
N117434: U25.39(R\I\) U26.9(R1OUT)
N117444: U25.33(D\T\R\) U26.16(T4IN)
N123056: U28.1(C\S\) U29.12(O\8\)
N124807: R17.1 U28.16(SP/E\N\)
N125571: U28.18(IR0) U35.4(Y)
N146408: U1.17(NMI) U35.2(Y)
N146815: C28.1 D2.1(K) R6.2 U35.1(A)
N146827: D2.2(A) R5.2 R6.1 SW21.3
N147071: C28.2 SW21.2
N148364: C29.1 D3.1(K) R8.2 U35.3(A)
N148392: D3.2(A) R7.2 R8.1 SW22.3
N168940: J1.2 U17.4(PA0)
N168944: J1.4 U17.3(PA1)
N168948: J1.6 U17.2(PA2)
N168952: J1.8 U17.1(PA3)
N168956: J1.10 U17.40(PA4)
N168960: J1.12 U17.39(PA5)
N168964: J1.14 U17.38(PA6)
N168968: J1.16 U17.37(PA7)
N169017: J1.20 U17.18(PB0)
N169021: J1.22 U17.19(PB1)
N169045: J1.24 U17.20(PB2)
N169049: J1.26 U17.21(PB3)
N169053: J1.28 U17.22(PB4)
N169057: J1.30 U17.23(PB5)
N169089: J1.29 U17.24(PB6)
N169119: J1.27 U17.25(PB7)
N169149: J1.25 U17.14(PC0)
N169164: J1.23 U17.15(PC1)
N169179: J1.21 U17.16(PC2)
N169194: J1.19 U17.17(PC3)
N169209: J1.17 U17.13(PC4)
N169224: J1.15 U17.12(PC5)
N169374: J1.13 U17.11(PC6)
N169386: J1.11 U17.10(PC7)
N169826: J8.2 U19.4(PA0)
N169830: J8.4 U19.3(PA1)
N169834: J8.6 U19.2(PA2)
N169838: J8.8 U19.1(PA3)
N169842: J8.10 U19.40(PA4)
N169846: J8.12 U19.39(PA5)
N169850: J8.14 U19.38(PA6)
N169854: J8.16 U19.37(PA7)
N169858: J8.20 U19.18(PB0)
N169862: J8.22 U19.19(PB1)
N169866: J8.24 U19.20(PB2)
N169870: J8.26 U19.21(PB3)
N169874: J8.28 U19.22(PB4)
N169878: J8.30 U19.23(PB5)
N169882: J8.29 U19.24(PB6)
N169902: J8.27 U19.25(PB7)
N169922: J8.25 U19.14(PC0)
N169934: J8.23 U19.15(PC1)
N169946: J8.21 U19.16(PC2)
N169958: J8.19 U19.17(PC3)
N169970: J8.17 U19.13(PC4)
N169982: J8.15 U19.12(PC5)
N169994: J8.13 U19.11(PC6)
N170006: J8.11 U19.10(PC7)
N170780: J9.2 U20.4(PA0)
N170784: J9.4 U20.3(PA1)
N170788: J9.6 U20.2(PA2)
N170792: J9.8 U20.1(PA3)
N170796: J9.10 U20.40(PA4)
N170800: J9.12 U20.39(PA5)
N170804: J9.14 U20.38(PA6)
N170808: J9.16 U20.37(PA7)
N170812: J9.20 U20.18(PB0)
N170816: J9.22 U20.19(PB1)
N170820: J9.24 U20.20(PB2)
N170824: J9.26 U20.21(PB3)
N170828: J9.28 U20.22(PB4)
N170832: J9.30 U20.23(PB5)
N170836: J9.29 U20.24(PB6)
N170856: J9.27 U20.25(PB7)
N170876: J9.25 U20.14(PC0)
N170888: J9.23 U20.15(PC1)
N170900: J9.21 U20.16(PC2)
N170912: J9.19 U20.17(PC3)
N170924: J9.17 U20.13(PC4)
N170936: J9.15 U20.12(PC5)
N170948: J9.13 U20.11(PC6)
N170960: J9.11 U20.10(PC7)
N203105: R3.1 U31.9(E)
N203221: R4.1 U33.9(E)
N203712: U32.11(CLK) U38.19(O\1\)
N203945: U34.11(CLK) U38.12(O\8\)
N213913: D4.1(CATHODE) U39.19(Q7)
N213927: D5.1(CATHODE) U39.16(Q6)
N213934: D6.1(CATHODE) U39.15(Q5)
N213941: D7.1(CATHODE) U39.12(Q4)
N213948: D8.1(CATHODE) U39.9(Q3)
N213955: D9.1(CATHODE) U39.6(Q2)
N213962: D10.1(CATHODE) U39.5(Q1)
N213969: D11.1(CATHODE) U39.2(Q0)
N284755: J6.7 U28.22(IR4)
N284759: J6.9 U28.23(IR5)
N284763: J6.11 U28.24(IR6)
N284767: J6.13 U28.25(IR7)
N305126: U25.36(C\T\S\) U26.6(R2OUT)
N315045: U38.18(O\2\) U39.11(CLK)
N362638: R19.1 SW24.23(B2) U37.4(A2)
N362642: R20.1 SW24.22(B3) U37.6(A3)
N362646: R21.1 SW24.21(B4) U37.8(A4)
N362650: R23.1 SW24.19(B6) U37.13(A6)
N362654: R24.1 SW24.18(B7) U37.15(A7)
N362658: R25.1 SW24.17(B8) U37.17(A8)
N362662: R22.1 SW24.20(B5) U37.11(A5)
N362810: U37.1(1\O\E\) U37.19(2\O\E\) U40.19(O\1\)
N362842: R18.1 SW24.24(B1) U37.2(A1)
N363730: R2.2(WIPER) U30.3(V0)
N366051: U30.6(E) U40.12(O\8\)
N424045: J4.1 U23.17(OUT2)
N424052: J4.3 U23.10(OUT0)
N430513: J5.1 U26.18(R4IN)
N430520: J5.2 U26.13(R5IN)
N2030970: U31.1(D0) U32.2(Q0)
N2030971: U31.2(D1) U32.5(Q1)
N2030972: U31.3(D2) U32.6(Q2)
N2030973: U31.4(D3) U32.9(Q3)
N2030974: U31.5(D4) U32.12(Q4)
N2030975: U31.6(D5) U32.15(Q5)
N2030976: U31.7(D6) U32.16(Q6)
N2030977: U31.8(D7) U32.19(Q7)
N2032530: U33.1(D0) U34.2(Q0)
N2032531: U33.2(D1) U34.5(Q1)
N2032532: U33.3(D2) U34.6(Q2)
N2032533: U33.4(D3) U34.9(Q3)
N2032534: U33.5(D4) U34.12(Q4)
N2032535: U33.6(D5) U34.15(Q5)
N2032536: U33.7(D6) U34.16(Q6)
N2032537: U33.8(D7) U34.19(Q7)
N2136990: D4.2(ANODE) R16.2
N2137510: D5.2(ANODE) R15.2
N2137770: D6.2(ANODE) R14.2
N2138030: D7.2(ANODE) R13.2
N2138290: D8.2(ANODE) R12.2
N2138550: D9.2(ANODE) R11.2
N2138810: D10.2(ANODE) R10.2
N2139070: D11.2(ANODE) R9.2

Pads without a net: J1 1 3 5 7 9 18 HOLE1 HOLE2; J4 5 7 9 11 13 14 HOLE1 HOLE2; J5 HOLE49 HOLE50; J6 1 2 3 4 5 6 8 10 12 14 HOLE1 HOLE2; J8 1 3 5 7 9 18 HOLE1 HOLE2; J9 1 3 5 7 9 18 HOLE1 HOLE2; J10 8 10 12 14 32 34 36 38 40 41 42 43 44 45 47 49 51 53 55 57 59 HOLE1 HOLE2; SW1 1 3; SW2 1 3; SW3 1 3; SW4 1 3; SW5 1 3; SW6 1 3; SW7 1 3; SW8 1 3; SW9 1 3; SW10 1 3; SW11 1 3; SW12 1 3; SW13 1 3; SW14 1 3; SW15 1 3; SW16 1 3; SW17 1 3; SW18 2 4; SW19 2 4; SW21 4; SW22 1 4; SW24 9 10 11 12 13 14 15 16; U1 18 23 30 31; U2 3 4 6 7 12 14 15; U3 3 5 7 8 9 11 12 13 15 17; U4 14 15 16 17 18 19; U10 30; U11 30; U14 7 8 9 11 12 13 14 15; U18 14 15 16 17 18; U21 13 19; U22 5 6 7 8 23 24 25 26 27 28 29 30 31; U24 13 14 19; U25 17 23 24 29 31 34; U26 3 4 7 8 20 21; U27 13 14 15 19; U28 12 13 15; U29 13 19; U30 15 16 HOLE_LL HOLE_LM HOLE_LN HOLE_LO; U31 10; U33 10; U35 5 6 8 9 10 11 12 13; U38 16; U40 16 18

## Via types
v1: diameter 0.61, hole 0.33, TOP to BOTTOM, 492 vias

## Routing (per net, layer and track width the routed paths; a pad name or vN(x,y) marks a point on that pad's centre or on a via; arc(x,y) is an arc through that point)
+5V: length 22.5
  TOP w0.508: D1.1 101.6,293.56 121.92,293.56 R1.1
A0: length 597.2
  TOP w0.508: v1(153.82,62.38) 139.7,62.38 U40.15 ; v1(66.04,47.04) v1(93.14,47.04) 154.94,47.04 U21.1 ; v1(153.82,71.17) 165.1,71.17 U38.15 ; U29.1 v1(153.82,104.14) 153.82,105.71 v1(279.3,105.71) ; U23.19 v1(279.3,162.56)
  BOTTOM w0.508: v1(153.82,104.14) v1(153.82,71.17) v1(153.82,62.38) 153.82,48.26 U21.1 ; U25.28 279.3,99.06 v1(279.3,105.71) v1(279.3,162.56) 279.3,193.04 ; U9.1 v1(66.04,47.04) ; 279.3,193.04 U6.19 ; 279.3,193.04 280.57,193.04 280.57,244.93 295.73,244.93 295.73,251.46 J10.39 ; U14.1 93.14,7.62 v1(93.14,47.04)
A1: length 894.9
  TOP w0.508: v1(224.94,107.37) v1(277.98,107.37) 281.89,107.37 281.89,101.6 U25.27 ; v1(184.73,95.1) v1(224.94,95.1) 224.94,93.98 U28.27 ; v1(66.73,69.7) 88.9,69.7 ; 88.9,69.7 U17.8 ; 88.9,69.7 100.65,69.7 100.65,74.78 130.66,74.78 130.66,67.41 v1(142.52,67.41) v1(149.17,67.41) 154.94,67.41 U38.2 ; 184.73,59.54 163.68,59.54 163.68,53.34 U40.2 ; 184.73,59.54 v1(184.73,61.54) ; 184.73,59.54 190.5,59.54 U22.21 ; U16.21 66.04,36.04 v1(31.6,36.04) 25.4,36.04 U15.21 ; v1(66.04,18.16) 87.63,18.16 87.63,16.36 144.78,16.36 U20.8 ; U19.8 v1(34.14,124.46)
  BOTTOM w0.508: v1(31.6,36.04) 32.28,36.04 32.28,44.83 35.56,44.83 U10.12 35.56,65.89 36.68,65.89 36.68,72.24 35.56,72.24 U11.12 35.56,95.1 34.14,95.1 v1(34.14,124.46) ; U40.2 149.17,53.34 v1(149.17,67.41) ; U13.21 v1(66.04,18.16) 64.92,18.16 64.92,27.15 66.04,27.15 U16.21 66.04,44.3 66.73,44.3 v1(66.73,69.7) ; U15.21 25.4,27.15 24.28,27.15 24.28,23.98 25.4,23.98 U12.21 ; 275.74,200.66 275.74,204.32 279.3,204.32 279.3,250.04 294.64,250.04 J10.37 ; 275.74,200.66 275.74,191.62 277.98,191.62 277.98,160.02 ; 275.74,200.66 U6.16 ; v1(142.52,67.41) 142.52,134.52 142.11,134.52 U30.4 ; 277.98,160.02 U23.20 ; 277.98,160.02 v1(277.98,107.37) ; v1(224.94,107.37) v1(224.94,95.1) ; v1(184.73,61.54) v1(184.73,95.1)
A2: length 846.7
  TOP w0.508: U29.2 141.15,106.68 ; 141.15,106.68 141.15,110.97 v1(144.65,110.97) 223.98,110.97 223.98,111.71 v1(272.52,111.71) v1(281.89,111.71) ; 141.15,106.68 v1(143.21,106.68) ; v1(274.95,203.2) U6.15 ; U40.3 v1(143.66,55.88) ; U21.2 157.48,46.3 v1(143.66,46.3) v1(90.02,46.3) v1(60.96,46.3) v1(33.02,46.3) v1(20.32,46.3)
  BOTTOM w0.508: v1(33.02,46.3) U10.11 34.14,53.34 34.14,70.33 33.02,70.33 U11.11 33.02,88.11 31.6,88.11 31.6,103.99 21.74,103.99 21.74,115.42 24.61,115.42 24.61,127 U19.9 ; v1(274.95,203.2) 274.95,158.11 272.9,158.11 272.9,149.86 U24.1 271.78,111.71 v1(272.52,111.71) ; v1(281.89,111.71) 281.89,104.14 U25.26 ; U21.2 156.36,48.26 156.36,60.17 157.48,60.17 U38.3 ; v1(20.32,46.3) U15.23 19.2,33.02 19.2,20.17 20.32,20.17 U12.23 ; v1(60.96,46.3) U16.23 60.96,30.96 59.84,30.96 59.84,22.71 60.96,22.71 U13.23 ; U17.9 87.15,71.12 87.15,59.54 90.02,59.54 v1(90.02,46.3) ; v1(143.21,106.68) 143.21,57.2 143.66,57.2 v1(143.66,55.88) v1(143.66,46.3) 143.66,18.26 147.32,18.26 U20.9 ; U30.5 v1(144.65,110.97) ; U6.15 279.93,203.2 279.93,247.5 294.64,247.5 J10.35
A3: length 710
  TOP w0.508: U24.2 v1(268.76,152.4) ; U27.1 251.46,119.96 ; 251.46,119.96 v1(268.76,119.96) ; 251.46,119.96 v1(161.14,119.96) ; U11.10 30.48,84.94 v1(50.8,84.94) ; U21.3 160.02,45.62 57.3,45.62 v1(57.3,44.35) 31.6,44.35 v1(31.6,42.88) 31.6,39.37 17.78,39.37 U15.24 ; U40.4 v1(161.14,58.42) ; U18.1 50.8,105.26 108.43,105.26 108.43,109.22 U29.3 ; v1(281.25,210.82) U6.12 v1(268.76,210.82)
  BOTTOM w0.508: U21.3 161.14,48.26 v1(161.14,58.42) 161.14,66.04 ; J10.33 294.64,242.42 281.25,242.42 v1(281.25,210.82) ; 161.14,66.04 v1(161.14,119.96) ; 161.14,66.04 U38.4 ; 57.3,33.02 57.3,20.17 58.42,20.17 U13.24 ; 57.3,33.02 v1(57.3,44.35) ; 57.3,33.02 U16.24 ; 31.6,53.34 v1(31.6,42.88) ; 31.6,53.34 31.6,83.82 U11.10 ; 31.6,53.34 U10.10 ; v1(50.8,84.94) U18.1 ; U15.24 17.78,27.15 16.66,27.15 16.66,21.44 17.78,21.44 U12.24 ; v1(268.76,119.96) v1(268.76,152.4) v1(268.76,210.82)
A4: length 653.1
  TOP w0.508: v1(27.94,35.31) 55.88,35.31 U16.25 ; U27.2 248.92,115.72 ; 248.92,115.72 v1(270.66,115.72) ; 248.92,115.72 248.92,114.99 163.05,114.99 v1(163.05,112.5) 163.05,111.76 U29.4 111.76,110.34 106.53,110.34 106.53,107.8 100.86,107.8 100.86,106.68 v1(52.6,106.68) U18.2 ; U6.9 284.48,209.45 v1(272.9,209.45) ; U15.25 15.24,40.69 v1(27.94,40.69) ; v1(52.6,87.53) 27.94,87.53 U11.9 ; U40.5 v1(163.68,60.96)
  BOTTOM w0.508: U24.3 270.66,154.94 ; 270.66,154.94 270.66,163.68 272.9,163.68 v1(272.9,209.45) ; 270.66,154.94 v1(270.66,115.72) ; U13.25 55.88,21.44 54.76,21.44 54.76,33.02 U16.25 ; U38.5 163.68,66.04 ; 163.68,66.04 v1(163.68,60.96) 163.68,48.26 U21.4 ; 163.68,66.04 163.68,93.19 163.05,93.19 v1(163.05,112.5) ; U11.9 27.94,79.22 29.06,79.22 29.06,64.34 27.94,64.34 U10.9 v1(27.94,40.69) v1(27.94,35.31) ; U12.25 15.24,21.44 14.12,21.44 14.12,29.69 15.24,29.69 U15.25 ; v1(52.6,87.53) v1(52.6,106.68) ; U6.9 287.66,210.82 287.66,239.85 294.64,239.85 J10.31
A5: length 762.4
  TOP w0.508: v1(166.22,151.03) v1(246.38,151.03) 272.9,151.03 272.9,156.36 ; v1(25.4,97.74) 29.06,97.74 29.06,105.26 48.11,105.26 48.11,109.22 U18.3 93.88,109.22 93.88,112.88 107.16,112.88 107.16,114.3 U29.5 ; U24.4 272.9,157.48 272.9,156.36 ; 272.9,156.36 v1(282.68,156.36) ; U15.26 12.7,31.9 24.28,31.9 ; 53.34,31.9 79.86,31.9 79.86,38.05 v1(147.24,38.05) ; 53.34,31.9 24.28,31.9 ; 53.34,31.9 U16.26 ; 24.28,31.9 24.28,37.36 v1(25.4,37.36) ; U21.5 165.1,43.97 v1(147.24,43.97)
  BOTTOM w0.508: 166.22,66.04 v1(166.22,151.03) ; 166.22,66.04 166.22,48.26 U21.5 ; 166.22,66.04 U38.6 ; U27.3 v1(246.38,151.03) ; v1(147.24,38.05) v1(147.24,43.97) 146.2,43.97 146.2,63.5 U40.6 ; U15.26 11.58,33.02 11.58,21.44 12.7,21.44 U12.26 ; J10.29 294.64,237.67 288.29,237.67 288.29,203.2 U6.6 282.68,203.2 v1(282.68,156.36) ; U13.26 53.34,21.44 52.22,21.44 52.22,33.02 U16.26 ; v1(25.4,37.36) U10.8 25.4,60.17 26.52,60.17 26.52,74.14 25.4,74.14 U11.8 v1(25.4,97.74)
A6: length 689.8
  TOP w0.508: v1(243.84,156.31) 267.18,156.31 267.18,160.02 U24.5 ; U27.4 243.84,119.33 168.76,119.33 v1(168.76,117.43) 168.76,115.72 111.76,115.72 ; 8.74,17.32 v1(45.77,17.32) ; 8.74,17.32 8.74,25.4 U15.1 ; 8.74,17.32 8.74,7.62 U12.1 ; U6.5 284.48,199.49 v1(274.27,199.49) ; 111.76,115.72 82.7,115.72 82.7,111.76 U18.4 45.57,111.76 45.57,107.8 23.98,107.8 23.98,97.74 v1(22.86,97.74) ; 111.76,115.72 U29.6 ; U38.7 167.64,64.92 147.32,64.92 U40.7 ; v1(45.77,51.69) 22.86,51.69 U10.7 ; U16.1 v1(45.77,25.4)
  BOTTOM w0.508: 168.76,66.04 168.76,48.26 U21.6 ; 168.76,66.04 v1(168.76,117.43) ; 168.76,66.04 U38.7 ; U10.7 22.86,65.25 23.98,65.25 23.98,76.68 22.86,76.68 U11.7 v1(22.86,97.74) ; v1(243.84,156.31) U27.4 ; J10.27 295.73,236.22 295.73,219.53 288.98,219.53 288.98,200.66 U6.5 ; v1(45.77,51.69) v1(45.77,25.4) v1(45.77,17.32) 45.77,7.62 U13.1 ; v1(274.27,199.49) 274.27,160.02 U24.5
A7: length 765.4
  TOP w0.508: U40.8 170.18,68.58 U38.8 170.18,64.29 176.38,64.29 v1(176.38,72.59) ; U29.7 111.76,117.96 68.71,117.96 68.71,114.3 v1(56.08,114.3) U18.5 ; v1(170.18,33.66) 86.36,33.66 86.36,29.06 v1(51.54,29.06) v1(20.75,29.06) v1(10.16,29.06) ; v1(273.58,191.62) 284.48,191.62 U6.2 288.77,193.04 288.77,204.29 296.37,204.29 296.37,233.68 J10.25 ; v1(176.38,118.64) 241.3,118.64 U27.5 ; v1(241.3,161.14) 265.91,161.14 265.91,162.56 U24.6 ; v1(56.08,90.07) 20.32,90.07 U11.6
  BOTTOM w0.508: v1(20.75,29.06) 20.75,30.66 21.44,30.66 21.44,53.34 ; v1(273.58,191.62) 273.58,162.56 U24.6 ; U10.6 21.44,53.34 ; 21.44,53.34 21.44,80.49 20.32,80.49 U11.6 ; U12.2 11.28,7.62 11.28,18.9 10.16,18.9 U15.2 v1(10.16,29.06) ; v1(51.54,29.06) 50.8,29.06 U16.2 50.8,18.9 51.92,18.9 51.92,7.62 U13.2 ; v1(56.08,90.07) v1(56.08,114.3) ; v1(170.18,33.66) U21.7 170.18,53.92 171.3,53.92 171.3,66.04 U38.8 ; v1(176.38,118.64) v1(176.38,72.59) ; v1(241.3,161.14) U27.5
A8: length 776.4
  TOP w0.508: U29.8 111.76,120.5 63.63,120.5 63.63,116.84 U18.6 ; U11.5 17.78,91.39 v1(51.92,91.39) ; v1(238.76,166.47) v1(265.86,166.47) 271.78,166.47 U24.7 ; 53.34,23.65 69.7,23.65 69.7,27.2 87.63,27.2 87.63,32.28 v1(172.72,32.28) ; 53.34,23.65 U16.3 ; 53.34,23.65 12.7,23.65 U15.3 ; v1(265.86,220.98) U5.19 281.79,220.98 281.79,222.1 295.73,222.1 295.73,231.14 J10.23 ; 171.6,70.48 150.98,70.48 150.98,71.12 U40.9 ; 171.6,70.48 v1(171.6,72.59) ; 171.6,70.48 171.6,66.04 U38.9 ; v1(171.6,121.34) v1(238.76,121.34)
  BOTTOM w0.508: U16.3 53.34,23.34 53.97,23.34 53.97,18.9 54.46,18.9 54.46,7.62 U13.3 ; U18.6 51.92,116.84 v1(51.92,91.39) ; U11.5 17.78,76.68 18.9,76.68 18.9,63.35 17.78,63.35 U10.5 17.78,46.2 13.82,46.2 13.82,30.96 12.7,30.96 U15.3 12.7,23.34 13.34,23.34 13.34,18.9 13.82,18.9 13.82,7.62 U12.3 ; v1(238.76,166.47) v1(238.76,121.34) U27.6 ; v1(172.72,32.28) U21.8 173.84,48.26 173.84,57.63 172.72,57.63 U38.9 ; v1(265.86,220.98) v1(265.86,166.47) ; v1(171.6,72.59) v1(171.6,121.34)
A9: length 791.9
  TOP w0.508: v1(175.26,32.97) 86.99,32.97 86.99,27.84 67.16,27.84 67.16,24.28 55.88,24.28 U16.4 55.88,26.52 15.24,26.52 U15.4 ; v1(175.26,117.96) 236.22,117.96 U27.7 ; v1(175.26,69.11) U38.11 175.26,75.41 139.7,75.41 U40.11 ; J10.21 294.64,227.48 281.79,227.48 281.79,228.6 U5.16 v1(269.98,228.6) ; U11.27 20.32,97.05 34.14,97.05 34.14,100.86 v1(49.63,100.86) ; v1(236.22,171.55) 273.53,171.55 273.53,167.64 U24.8 ; U18.7 56.36,119.38 56.36,125.58 111.76,125.58 U29.9
  BOTTOM w0.508: v1(175.26,117.96) U38.11 ; v1(236.22,171.55) U27.7 ; v1(175.26,32.97) U21.9 176.38,48.26 176.38,69.11 v1(175.26,69.11) ; v1(49.63,100.86) 49.63,119.38 U18.7 ; U11.27 19.2,99.06 19.2,78.59 20.32,78.59 U10.27 20.32,58.9 18.9,58.9 18.9,39.85 16.36,39.85 16.36,28.42 15.24,28.42 U15.4 15.24,23.34 15.88,23.34 15.88,18.9 16.36,18.9 16.36,7.62 U12.4 ; U16.4 55.88,23.34 56.52,23.34 56.52,18.26 57,18.26 57,7.62 U13.4 ; v1(269.98,228.6) 269.98,167.64 U24.8
A10: length 799.5
  TOP w0.508: v1(177.8,115.67) 233.68,115.67 U27.8 ; v1(59.54,51.92) 118.59,51.92 118.59,49.68 177.8,49.68 U21.11 ; U10.26 22.86,70.33 9.04,70.33 9.04,27.15 14.12,27.15 ; U29.11 53.82,127 53.82,121.92 U18.8 50.8,120.5 44.3,120.5 44.3,117.96 21.74,117.96 21.74,99.06 U11.26 ; 14.12,27.15 58.42,27.15 U16.5 ; 14.12,27.15 14.12,24.28 17.78,24.28 U15.5 ; U5.15 276.86,229.77 ; 276.86,229.77 v1(270.66,229.77) ; 276.86,229.77 v1(285.65,229.77) ; J10.19 294.64,224.97 290.3,224.97 290.3,225.96 v1(285.65,225.96) ; v1(170.18,69.7) 142.72,69.7 142.72,68.58 U40.13 ; U24.9 271.78,169.01 v1(233.68,169.01)
  BOTTOM w0.508: v1(59.54,51.92) 59.54,31.6 58.42,31.6 U16.5 58.42,21.44 59.54,21.44 59.54,7.62 U13.5 ; U12.5 18.9,7.62 18.9,18.26 18.41,18.26 18.41,23.34 17.78,23.34 U15.5 ; v1(285.65,229.77) v1(285.65,225.96) ; U24.9 270.66,170.18 v1(270.66,229.77) ; U11.26 21.74,99.06 21.74,81.76 22.07,81.76 22.07,72.87 22.86,72.87 U10.26 ; v1(233.68,169.01) U27.8 ; 170.18,71.91 177.8,71.91 ; 170.18,71.91 v1(170.18,69.7) ; 170.18,71.91 U38.13 ; 177.8,71.91 U21.11 ; 177.8,71.91 v1(177.8,115.67)
A11: length 752.6
  TOP w0.508: v1(167.64,127.61) v1(231.14,127.61) ; U21.18 160.02,54.76 v1(137.77,54.76) 107,54.76 107,54.93 95.57,54.93 95.57,54.76 v1(62.81,54.76) 30.48,54.76 U10.23 ; v1(167.64,67.84) 168.76,67.84 168.76,61.65 v1(160.02,61.65) ; U29.18 97.69,109.22 97.69,108.1 v1(52.6,108.1) 49.38,108.1 49.38,102.92 30.48,102.92 U11.23 ; v1(231.14,172.72) U24.11 ; v1(264.16,238.76) U5.12 281.79,238.76 281.79,237.34 286.97,237.34 286.97,232.28 v1(292.51,232.28) ; U12.6 20.32,8.74 60.96,8.74 U13.6
  BOTTOM w0.508: v1(264.16,238.76) U24.11 ; J10.17 293.19,223.52 293.19,232.28 v1(292.51,232.28) ; v1(167.64,127.61) U38.14 v1(167.64,67.84) ; U18.9 52.6,124.46 v1(52.6,108.1) ; U12.6 21.44,7.62 21.44,21.44 20.32,21.44 U15.6 ; v1(231.14,172.72) v1(231.14,127.61) U27.9 ; U10.23 30.48,81.13 29.36,81.13 29.36,99.06 U11.23 ; U40.14 137.77,66.04 v1(137.77,54.76) ; v1(62.81,54.76) 62.81,41.27 62.08,41.27 62.08,30.33 60.96,30.33 U16.6 60.96,23.98 61.59,23.98 61.59,18.9 62.08,18.9 62.08,7.62 U13.6 ; v1(160.02,61.65) U21.18
A12: length 710.4
  TOP w0.508: v1(227.48,154.94) U24.18 ; v1(267.23,219.56) v1(286.97,219.56) 294.64,219.56 J10.15 ; U29.17 109.07,111.76 109.07,112.88 v1(141.84,112.88) ; v1(141.84,108.48) 141.84,109.22 U27.11 ; U13.7 63.5,5.23 22.86,5.23 U12.7 ; v1(64.62,59.54) 100.65,59.54 100.65,57 v1(141.84,57) 162.56,57 U21.17
  BOTTOM w0.508: U9.4 64.62,83.82 v1(64.62,59.54) 64.62,28.42 63.5,28.42 U16.7 63.5,23.34 64.13,23.34 64.13,16.99 64.62,16.99 64.62,7.62 U13.7 ; v1(141.84,112.88) v1(141.84,108.48) v1(141.84,57) ; v1(267.23,219.56) 267.23,154.94 U24.18 ; v1(286.97,219.56) 286.97,238.76 U5.9 ; U12.7 23.98,7.62 23.98,23.34 22.86,23.34 U15.7 22.86,28.76 23.98,28.76 23.98,62.71 25.4,62.71 U10.25 25.4,71.6 24.61,71.6 24.61,79.86 24.28,79.86 24.28,99.06 U11.25 ; v1(227.48,154.94) 227.48,109.22 U27.11
A12-A15: length 150.9
  TOP w0.508: v1(60.17,100.18) 96.98,100.18 96.98,91.64 v1(151.18,91.64)
  BOTTOM w0.508: v1(60.17,100.18) 60.17,96.52 U9.12 ; U38.1 151.18,66.04 ; 151.18,66.04 v1(151.18,91.64) ; 151.18,66.04 151.18,50.8 U40.1
A13: length 664.7
  TOP w0.508: v1(26.52,28.17) 66.04,28.17 U16.8 ; U10.4 15.24,51 v1(26.52,51) ; U27.18 246.38,108.1 v1(173.84,108.1) ; v1(173.84,58.32) 165.1,58.32 U21.16 ; v1(281.99,217.32) 294.64,217.32 J10.13 ; v1(247.5,157.48) U24.17 266.55,157.48 266.55,161.39 v1(281.99,161.39) ; U9.5 66.04,87.48 104.14,87.48 v1(104.14,88.85) 104.14,89.54 v1(173.84,89.54) ; v1(173.84,74.49) v1(173.84,71.22)
  BOTTOM w0.508: U5.6 281.99,231.14 v1(281.99,217.32) v1(281.99,161.39) ; v1(247.5,157.48) 247.5,109.22 U27.18 ; v1(26.52,51) v1(26.52,28.17) 26.52,25.4 ; U29.16 103.02,114.3 103.02,88.85 v1(104.14,88.85) ; U13.8 67.16,7.62 67.16,25.4 ; U9.5 67.79,86.36 67.79,39.22 67.16,39.22 67.16,25.4 ; 26.52,25.4 26.52,7.62 U12.8 ; 26.52,25.4 U15.8 ; 67.16,25.4 U16.8 ; v1(173.84,71.22) v1(173.84,58.32) ; U11.4 15.24,73.51 16.36,73.51 16.36,53.34 U10.4 ; v1(173.84,108.1) v1(173.84,89.54) v1(173.84,74.49)
A14: length 768.3
  TOP w0.508: v1(266.55,216.15) v1(283.36,216.15) v1(290.93,216.15) ; v1(167.64,63.75) v1(156.06,63.75) ; U29.15 v1(71.86,116.84) ; v1(243.84,111.02) v1(261.62,111.02) ; U12.9 27.94,6.5 62.08,6.5 62.08,8.74 68.58,8.74 U13.9 ; v1(156.06,84.46) 91.92,84.46 91.92,75.08 v1(68.53,75.08) ; U10.28 17.78,59.84 v1(29.06,59.84) ; U21.15 167.64,57.63 180.82,57.63 180.82,57.3 v1(261.62,57.3) ; v1(71.86,88.9) U9.6 ; v1(261.62,160.02) U24.16
  BOTTOM w0.508: v1(283.36,216.15) 283.36,228.6 U5.5 ; U12.9 29.06,7.62 29.06,17.63 27.94,17.63 U15.9 27.94,28.42 29.06,28.42 v1(29.06,59.84) ; v1(156.06,63.75) v1(156.06,84.46) ; v1(261.62,57.3) v1(261.62,111.02) v1(261.62,160.02) ; U10.28 17.78,75.41 16.66,75.41 16.66,99.06 U11.28 ; U9.6 68.53,88.9 v1(68.53,75.08) 68.53,44.3 69.7,44.3 69.7,29.69 68.58,29.69 U16.9 68.58,17.63 69.7,17.63 69.7,7.62 U13.9 ; v1(167.64,63.75) U21.15 ; U27.17 v1(243.84,111.02) ; J10.11 294.64,214.81 290.93,214.81 v1(290.93,216.15) ; v1(266.55,216.15) 266.55,160.02 U24.16 ; v1(71.86,88.9) v1(71.86,116.84)
A15: length 719
  TOP w0.508: U9.7 66.04,92.56 v1(15.24,92.56) ; v1(178.49,60.32) v1(170.18,60.32) ; v1(30.48,21.49) v1(71.12,21.49) ; J10.9 294.64,214.73 v1(285.6,214.73) v1(263.04,214.73) ; U29.14 v1(69.8,119.38) ; v1(69.8,72.54) 93.83,72.54 93.83,83.77 v1(178.49,83.77) ; v1(263.04,113.56) v1(241.3,113.56) v1(178.49,113.56)
  BOTTOM w0.508: 263.04,162.56 v1(263.04,214.73) ; 263.04,162.56 U24.15 ; 263.04,162.56 v1(263.04,113.56) ; U5.2 285.6,220.98 v1(285.6,214.73) ; U15.10 v1(30.48,21.49) 30.48,20.17 31.6,20.17 31.6,7.62 U12.10 ; U27.16 v1(241.3,113.56) ; v1(178.49,60.32) v1(178.49,83.77) v1(178.49,113.56) ; 69.8,91.44 U9.7 ; 69.8,91.44 v1(69.8,72.54) 69.8,47.52 72.24,47.52 72.24,30.38 71.12,30.38 U16.10 v1(71.12,21.49) 72.24,21.49 72.24,7.62 U13.10 ; 69.8,91.44 v1(69.8,119.38) ; U11.29 15.24,93.24 ; 15.24,93.24 v1(15.24,92.56) ; 15.24,93.24 14.12,93.24 14.12,72.24 15.24,72.24 U10.29 ; U21.14 v1(170.18,60.32)
A16: length 581
  TOP w0.508: U10.3 12.7,49.68 93.19,49.68 93.19,49.95 v1(100,49.95) ; v1(100,211.94) 277.29,211.94 277.29,212.14 v1(277.98,212.14) 294.64,212.14 J10.7
  BOTTOM w0.508: v1(277.98,212.14) 277.98,266.7 U4.12 ; v1(100,211.94) v1(100,49.95) 100,10.16 U14.2 ; U10.3 13.82,53.34 13.82,70.33 12.7,70.33 U11.3
A17: length 592.4
  TOP w0.508: v1(93.83,188.14) 290.68,188.14 290.68,202.06 v1(293.24,202.06) ; U10.2 10.16,48.47 v1(93.83,48.47)
  BOTTOM w0.508: U10.2 9.04,53.34 9.04,83.82 U11.2 ; U4.9 286.87,266.7 286.87,252.88 296.37,252.88 296.37,208.28 J10.5 293.24,208.28 v1(293.24,202.06) ; U14.3 93.83,12.7 v1(93.83,48.47) v1(93.83,188.14)
A18: length 429.4
  TOP w0.508: v1(295.73,186.82) v1(67.16,186.82) ; U4.6 v1(288.82,259.08)
  BOTTOM w0.508: v1(67.16,186.82) 67.16,95.1 64.92,95.1 64.92,84.94 67.16,84.94 67.16,78.74 U9.2 ; J10.3 295.73,205.74 ; 295.73,205.74 v1(295.73,186.82) ; 295.73,205.74 297,205.74 297,255.09 288.82,255.09 v1(288.82,259.08)
A19: length 427.6
  TOP w0.508: J10.1 297,203.2 ; 297,203.2 297,185.5 v1(62.81,185.5) ; 297,203.2 297,255.12 284.48,255.12 U4.5 ; U9.3 v1(62.81,81.28)
  BOTTOM w0.508: v1(62.81,81.28) v1(62.81,185.5)
A[0,12-15]: length 60.7
  TOP w0.508: v1(56.77,128.12) 48.31,128.12 48.31,127 U18.11
  BOTTOM w0.508: U9.17 56.77,83.82 v1(56.77,128.12)
AD0: length 330.2
  TOP w0.508: U7.9 261.62,283.85 50.8,283.85 U1.16 ; U6.18 v1(261.62,195.58)
  BOTTOM w0.508: v1(261.62,195.58) U7.9
AD1: length 330.2
  TOP w0.508: U1.15 48.26,284.48 259.08,284.48 U7.8 ; U6.17 v1(259.08,198.12)
  BOTTOM w0.508: v1(259.08,198.12) U7.8
AD2: length 325.1
  TOP w0.508: U1.14 45.72,285.12 256.54,285.12 U7.7 ; U6.14 v1(256.54,205.74)
  BOTTOM w0.508: v1(256.54,205.74) U7.7
AD3: length 329.4
  TOP w0.508: U6.13 v1(254,208.28) ; U1.13 43.18,288.14 117.6,288.14 117.6,285.98 254,285.98 U7.6
  BOTTOM w0.508: v1(254,208.28) U7.6
AD4: length 346.8
  TOP w0.508: U1.12 40.64,288.77 155.98,288.77 155.98,287.81 251.46,287.81 U7.5 ; U6.8 285.6,208.28 285.6,204.62 v1(251.46,204.62)
  BOTTOM w0.508: v1(251.46,204.62) U7.5
AD5: length 344
  TOP w0.508: U7.4 248.92,291.36 v1(48.95,291.36) ; v1(248.92,206.86) 284.48,206.86 U6.7
  BOTTOM w0.508: v1(48.95,291.36) 38.1,291.36 U1.11 ; v1(248.92,206.86) U7.4
AD6: length 344.6
  TOP w0.508: U6.4 285.6,198.12 285.6,201.78 v1(246.38,201.78) ; U1.10 35.56,278.28 65.89,278.28 65.89,279.17 v1(246.38,279.17)
  BOTTOM w0.508: U7.3 v1(246.38,279.17) v1(246.38,201.78)
AD7: length 347.3
  TOP w0.508: v1(243.84,196.7) 284.48,196.7 U6.3 ; v1(243.84,277.75) 69.7,277.75 69.7,277.65 33.02,277.65 U1.9
  BOTTOM w0.508: U7.2 v1(243.84,277.75) v1(243.84,196.7)
AD8: length 315.8
  TOP w0.508: U1.8 30.48,275.97 v1(231.14,275.97) ; U5.18 v1(231.14,223.52)
  BOTTOM w0.508: v1(231.14,223.52) v1(231.14,275.97) U8.9
AD9: length 319.4
  TOP w0.508: v1(228.6,272.47) 27.94,272.47 U1.7 ; U5.17 v1(228.6,226.06)
  BOTTOM w0.508: U8.8 v1(228.6,272.47) v1(228.6,226.06)
AD10: length 315.3
  TOP w0.508: U5.14 v1(226.06,233.68) ; U1.6 25.4,271.45 v1(226.06,271.45)
  BOTTOM w0.508: v1(226.06,233.68) v1(226.06,271.45) U8.7
AD11: length 316.1
  TOP w0.508: v1(223.52,270.66) 22.86,270.66 U1.5 ; U5.13 v1(223.52,236.22)
  BOTTOM w0.508: U8.6 v1(223.52,270.66) v1(223.52,236.22)
AD12: length 327.2
  TOP w0.508: U5.8 279.88,236.22 279.88,237.34 v1(220.98,237.34) ; U1.4 20.32,269.72 v1(220.98,269.72)
  BOTTOM w0.508: U8.5 v1(220.98,269.72) v1(220.98,237.34)
AD13: length 335.2
  TOP w0.508: v1(218.44,269.04) 17.78,269.04 U1.3 ; U5.7 284.48,232.56 v1(218.44,232.56)
  BOTTOM w0.508: v1(218.44,232.56) v1(218.44,269.04) U8.4
AD14: length 343.8
  TOP w0.508: U1.2 15.24,268.35 v1(215.9,268.35) ; v1(215.9,227.18) 279.88,227.18 279.88,226.06 U5.4
  BOTTOM w0.508: v1(215.9,227.18) v1(215.9,268.35) U8.3
AD15: length 344.8
  TOP w0.508: U1.39 15.24,290.04 183.29,290.04 183.29,288.44 213.36,288.44 U8.2 ; v1(213.36,222.4) 279.88,222.4 279.88,223.52 U5.3
  BOTTOM w0.508: v1(213.36,222.4) U8.2
AD16: length 289.6
  TOP w0.508: U4.13 v1(19.2,264.16)
  BOTTOM w0.508: v1(19.2,264.16) 19.2,294.64 U1.38
AD17: length 312.8
  TOP w0.508: v1(283.36,280.52) 286.87,280.52 286.87,300.2 20.32,300.2 U1.37
  BOTTOM w0.508: U4.8 283.36,264.16 v1(283.36,280.52)
AD18: length 294.6
  TOP w0.508: v1(24.28,262.74) 284.48,262.74 U4.7
  BOTTOM w0.508: U1.36 24.28,294.64 v1(24.28,262.74)
AD19: length 299.7
  TOP w0.508: U4.4 283.74,254 283.74,255.27 v1(26.52,255.27)
  BOTTOM w0.508: U1.35 26.52,294.64 v1(26.52,255.27)
ALE: length 328
  TOP w0.508: U4.11 254.1,269.24 254.1,276.07 262.74,276.07 262.74,292.68 50.8,292.68 U1.25
  BOTTOM w0.508: 275.74,241.3 275.74,213.36 U6.11 ; 275.74,241.3 U5.11 ; 275.74,241.3 275.74,269.24 U4.11
BHE: length 460.7
  TOP w0.508: v1(98.93,247.5) 284.48,247.5 U4.2 ; v1(98.93,90.32) 58.42,90.32 U9.14
  BOTTOM w0.508: U14.5 98.93,17.78 v1(98.93,90.32) v1(98.93,247.5)
BHEX: length 299.7
  TOP w0.508: U4.3 284.48,252.58 v1(29.36,252.58)
  BOTTOM w0.508: v1(29.36,252.58) 29.36,294.64 U1.34
BWE: length 199.4
  TOP w0.508: U9.13 v1(11.28,93.98) ; U13.27 50.8,16.36 10.16,16.36 U12.27
  BOTTOM w0.508: U10.31 11.28,68.58 ; 11.28,68.58 v1(11.28,93.98) 11.28,99.06 U11.31 ; 11.28,68.58 11.28,49.38 10.16,49.38 U15.27 9.04,33.02 9.04,15.24 U12.27 ; U16.27 49.68,33.02 49.68,15.24 U13.27
